# EAGLE board femtoBeacon_r2.0.7_RGB_OTG_PANELIZED (EAGLE 7.6.0), part 1 of 9
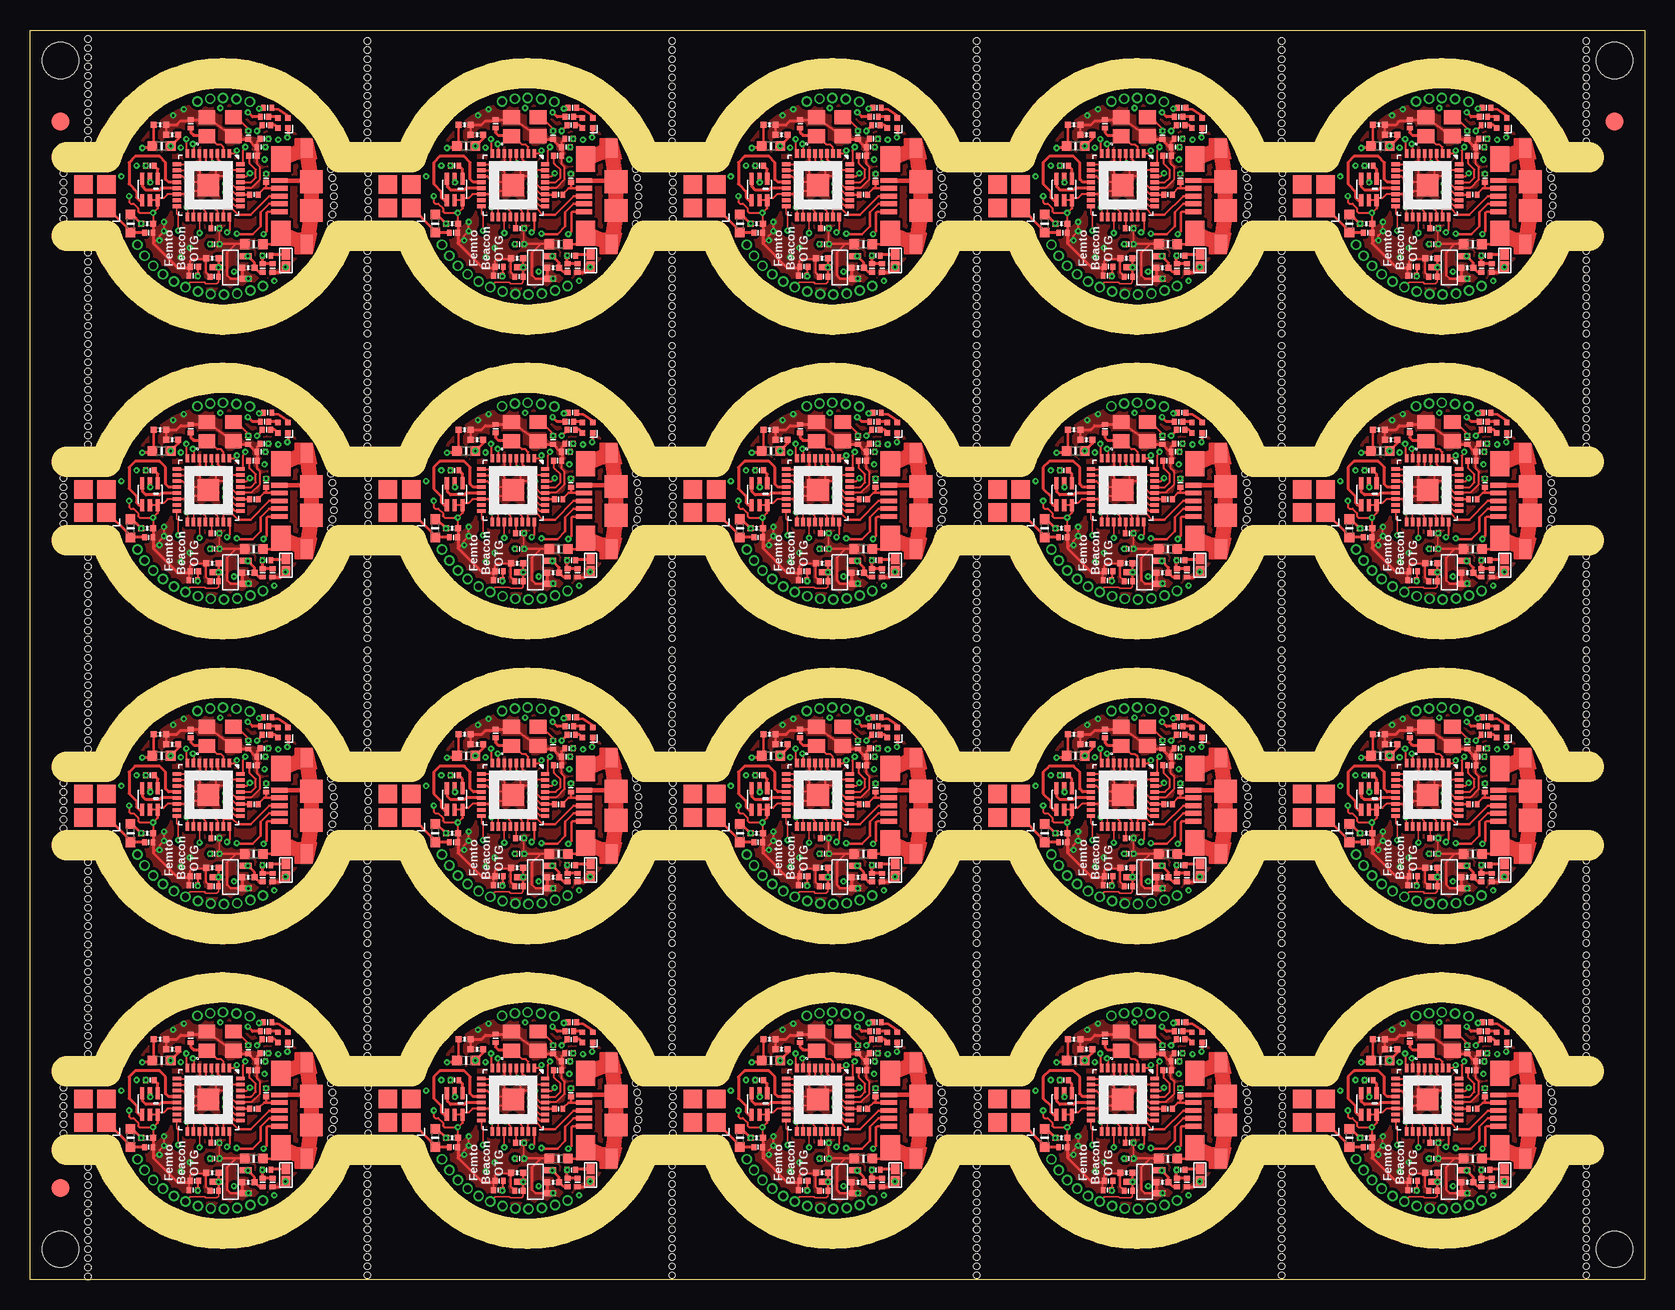
[diagram p0: board, top side]
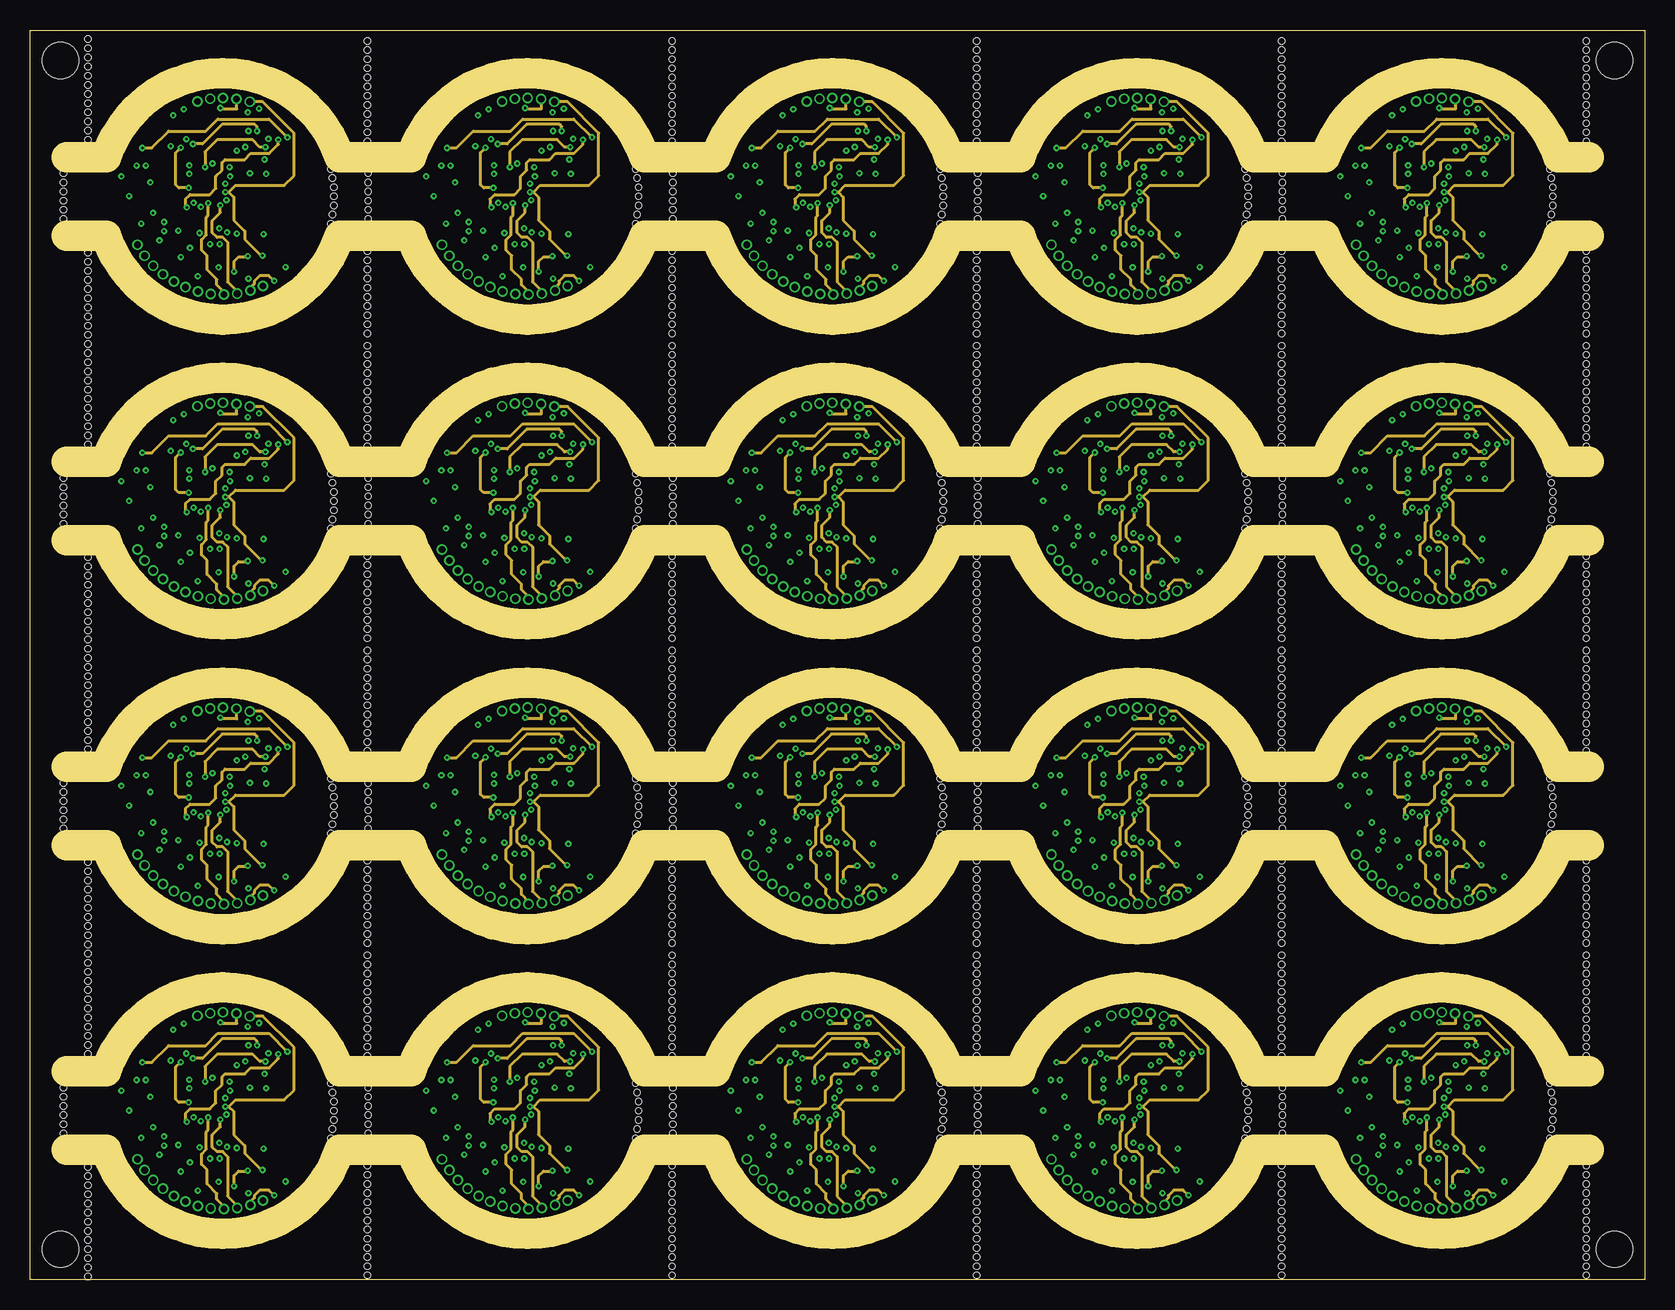
[diagram p1: board, inner layer Route2]
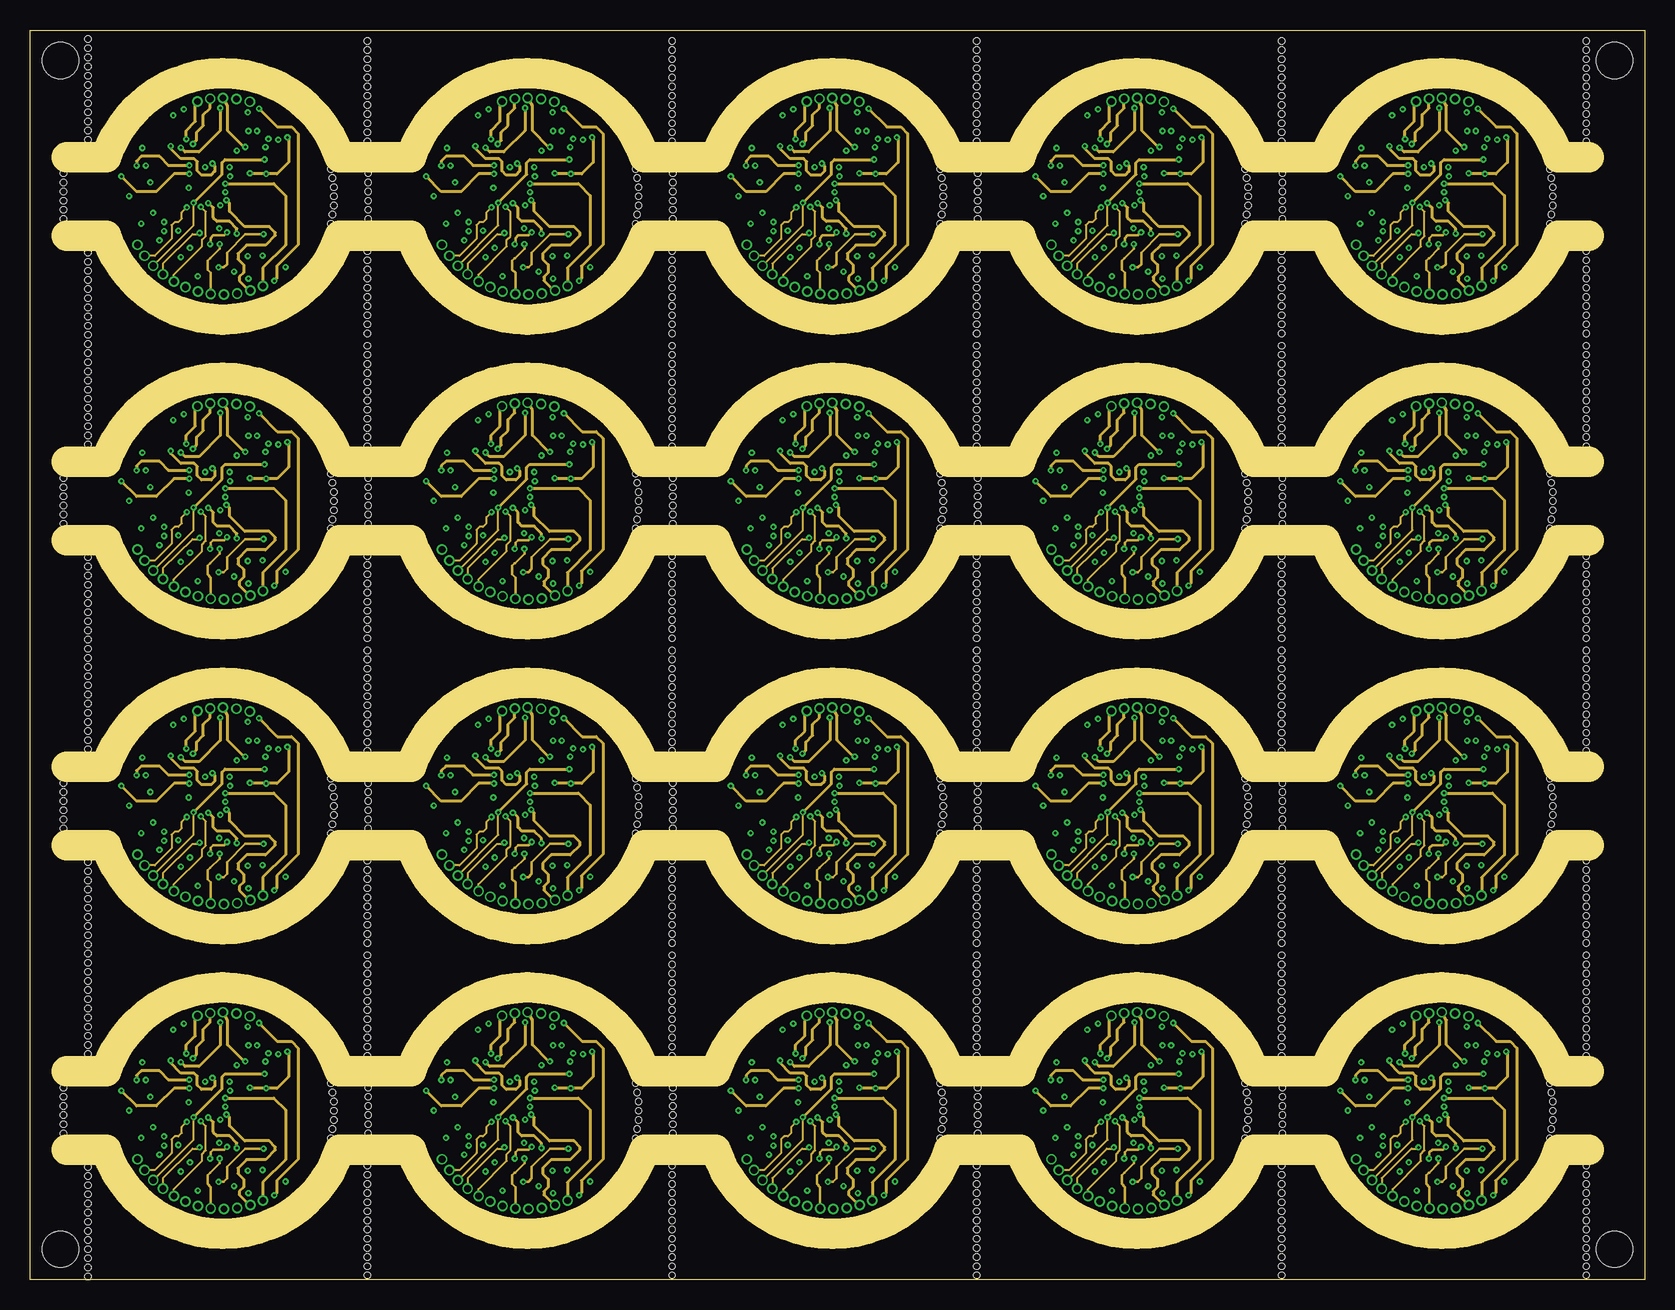
[diagram p2: board, inner layer Route15]
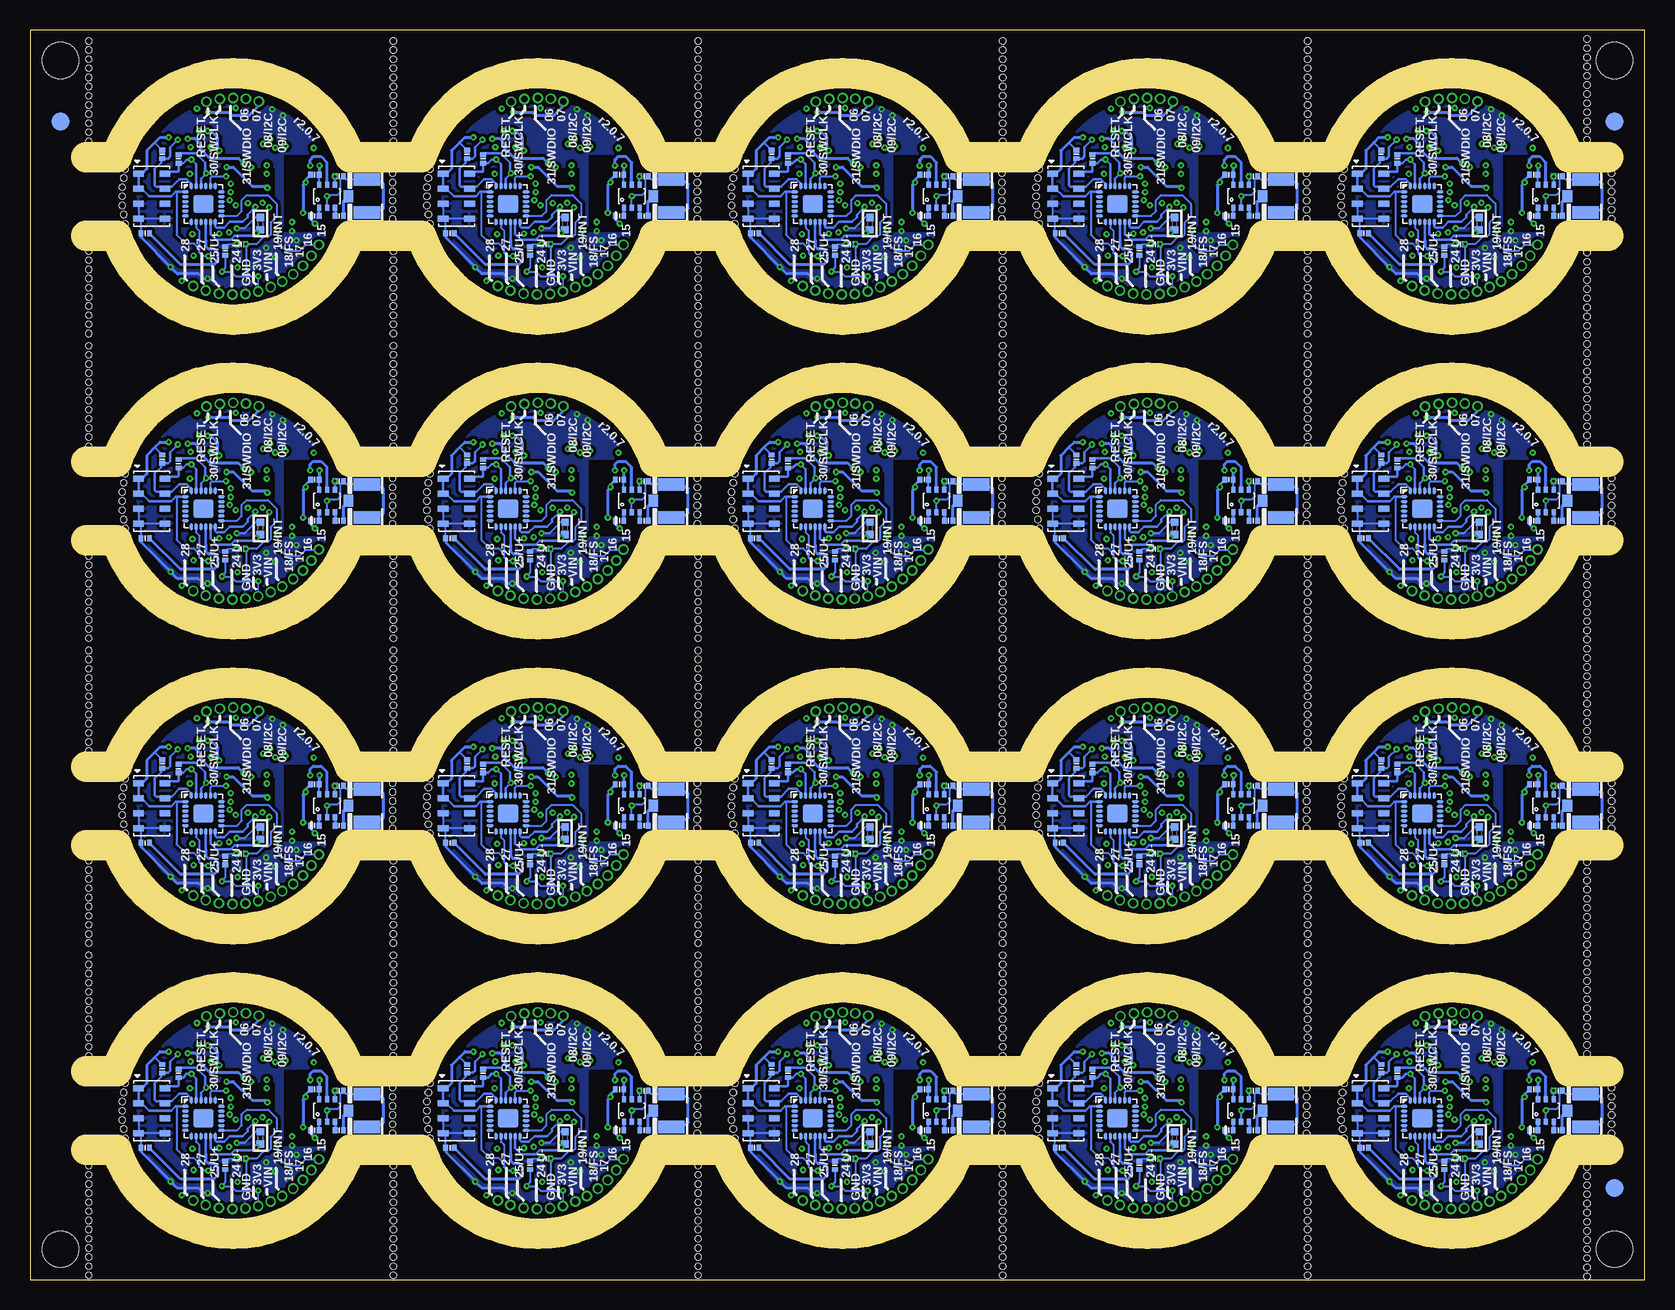
[diagram p3: board, bottom side, seen from below]

Size 134.62 x 104.14 mm. Coordinates in mm from the lower left corner, seen from the top.
Outline: 0,0 0,104.14 134.62,104.14 134.62,0 0,0
Copper layers (1*2*15*16): Top 0.035559375mm / dielectric 0.17018125mm / Route2 0.01778125mm / dielectric 47mil / Route15 0.01778125mm / dielectric 0.17018125mm / Bottom 0.035559375mm
Design rules "OSHPark-4layer *": minimum track width 5mil, minimum drill 10mil, track to track 5mil, track to pad 5mil, pad to pad 5mil, via to via 5mil, smd to smd 5mil, copper to edge 15mil, drill to drill 6mil, minimum pad ring 4mil, minimum via ring 4mil, stop-mask expansion 2.5mil, vias tented up to drill 10mil, thermal gap 10mil
Holes 0.51 mm at 2.79,16 2.79,12.19 2.79,12.95 2.79,13.72 2.79,14.48 2.79,15.24 25.33,14.08 25.08,16.37 25.33,14.84 25.33,13.32 25.21,15.6 25.08,11.79 25.21,12.56 4.83,18.8 4.83,9.4 4.83,19.56 4.83,20.32 4.83,21.08 4.83,21.84 4.83,22.61 4.83,23.37 4.83,24.13 4.83,24.89 4.83,25.65 4.83,26.42 4.83,27.18 4.83,8.64 4.83,7.87 4.83,7.11 4.83,6.35 4.83,5.59 4.83,4.83 4.83,4.06 4.83,3.3 28.13,9.51 28.13,8.75 28.13,7.98 28.13,7.22 28.13,6.46 28.13,5.7 28.13,4.94 28.13,4.17 28.13,3.41 28.13,18.65 28.13,19.41 28.13,20.18 28.13,20.94 28.13,21.7 28.13,22.46 28.13,23.22 28.13,23.99 28.13,24.75 28.13,25.51 28.13,26.27 28.13,27.03 2.79,41.4 2.79,37.59 2.79,38.35 2.79,39.12 2.79,39.88 2.79,40.64 25.33,39.48 25.08,41.77 25.33,40.24 25.33,38.72 25.21,41 25.08,37.19 25.21,37.96 4.83,44.2 4.83,34.8 4.83,44.96 4.83,45.72 4.83,46.48 4.83,47.24 4.83,48.01 4.83,48.77 4.83,49.53 4.83,50.29 4.83,51.05 4.83,51.82 4.83,52.58 4.83,34.04 4.83,33.27 4.83,32.51 4.83,31.75 4.83,30.99 4.83,30.23 4.83,29.46 4.83,28.7 28.13,34.91 28.13,34.15 28.13,33.38 28.13,32.62 28.13,31.86 28.13,31.1 28.13,30.34 28.13,29.57 28.13,28.81 28.13,44.05 28.13,44.81 28.13,45.58 28.13,46.34 28.13,47.1 28.13,47.86 28.13,48.62 28.13,49.39 28.13,50.15 28.13,50.91 28.13,51.67 28.13,52.43 2.79,66.8 2.79,62.99 2.79,63.75 2.79,64.52 2.79,65.28 2.79,66.04 25.33,64.88 25.08,67.17 25.33,65.64 25.33,64.12 25.21,66.4 25.08,62.59 25.21,63.36 4.83,69.6 4.83,60.2 4.83,70.36 4.83,71.12 4.83,71.88 4.83,72.64 4.83,73.41 4.83,74.17 4.83,74.93 4.83,75.69 4.83,76.45 4.83,77.22 4.83,77.98 4.83,59.44 4.83,58.67 4.83,57.91 4.83,57.15 4.83,56.39 4.83,55.63 4.83,54.86 4.83,54.1 28.13,60.31 28.13,59.55 28.13,58.78 28.13,58.02 28.13,57.26 28.13,56.5 28.13,55.74 28.13,54.97 28.13,54.21 28.13,69.45 28.13,70.21 28.13,70.98 28.13,71.74 28.13,72.5 28.13,73.26 28.13,74.02 28.13,74.79 28.13,75.55 28.13,76.31 28.13,77.07 28.13,77.83 2.79,92.2 2.79,88.39 2.79,89.15 2.79,89.92 2.79,90.68 2.79,91.44 25.33,90.28 25.08,92.57 25.33,91.04 25.33,89.52 25.21,91.8 25.08,87.99 25.21,88.76 4.83,95 4.83,85.6 4.83,95.76 4.83,96.52 4.83,97.28 4.83,98.04 4.83,98.81 4.83,99.57 4.83,100.33 4.83,101.09 4.83,101.85 4.83,102.62 4.83,103.38 4.83,84.84 4.83,84.07 4.83,83.31 4.83,82.55 4.83,81.79 4.83,81.03 4.83,80.26 4.83,79.5 28.13,85.71 28.13,84.95 28.13,84.18 28.13,83.42 28.13,82.66 28.13,81.9 28.13,81.14 28.13,80.37 28.13,79.61 28.13,94.85 28.13,95.61 28.13,96.38 28.13,97.14 28.13,97.9 28.13,98.66 28.13,99.42 28.13,100.19 28.13,100.95 28.13,101.71 28.13,102.47 28.13,103.23 28.19,16 28.19,12.19 28.19,12.95 28.19,13.72 28.19,14.48 28.19,15.24 50.73,14.08 50.48,16.37 50.73,14.84 50.73,13.32 50.61,15.6 50.48,11.79 50.61,12.56 28.19,41.4 28.19,37.59 28.19,38.35 28.19,39.12 28.19,39.88 28.19,40.64 50.73,39.48 50.48,41.77 50.73,40.24 50.73,38.72 50.61,41 50.48,37.19 50.61,37.96 28.19,66.8 28.19,62.99 28.19,63.75 28.19,64.52 28.19,65.28 28.19,66.04 50.73,64.88 50.48,67.17 50.73,65.64 50.73,64.12 50.61,66.4 50.48,62.59 50.61,63.36 28.19,92.2 28.19,88.39 28.19,89.15 28.19,89.92 28.19,90.68 28.19,91.44 50.73,90.28 50.48,92.57 50.73,91.04 50.73,89.52 50.61,91.8 50.48,87.99 50.61,88.76 53.59,16 53.59,12.19 53.59,12.95 53.59,13.72 53.59,14.48 53.59,15.24 76.13,14.08 75.88,16.37 76.13,14.84 76.13,13.32 76.01,15.6 75.88,11.79 76.01,12.56 53.59,41.4 53.59,37.59 53.59,38.35 53.59,39.12 53.59,39.88 53.59,40.64 76.13,39.48 75.88,41.77 76.13,40.24 76.13,38.72 76.01,41 75.88,37.19 76.01,37.96 53.59,66.8 53.59,62.99 53.59,63.75 53.59,64.52 53.59,65.28 53.59,66.04 76.13,64.88 75.88,67.17 76.13,65.64 76.13,64.12 76.01,66.4 75.88,62.59 76.01,63.36 53.59,92.2 53.59,88.39 53.59,89.15 53.59,89.92 53.59,90.68 53.59,91.44 76.13,90.28 75.88,92.57 76.13,91.04 76.13,89.52 76.01,91.8 75.88,87.99 76.01,88.76 78.99,16 78.99,12.19 78.99,12.95 78.99,13.72 78.99,14.48 78.99,15.24 101.53,14.08 101.28,16.37 101.53,14.84 101.53,13.32 101.41,15.6 101.28,11.79 101.41,12.56 78.99,41.4 78.99,37.59 78.99,38.35 78.99,39.12 78.99,39.88 78.99,40.64 101.53,39.48 101.28,41.77 101.53,40.24 101.53,38.72 101.41,41 101.28,37.19 101.41,37.96 78.99,66.8 78.99,62.99 78.99,63.75 78.99,64.52 78.99,65.28 78.99,66.04 101.53,64.88 101.28,67.17 101.53,65.64 101.53,64.12 101.41,66.4 101.28,62.59 101.41,63.36 78.99,92.2 78.99,88.39 78.99,89.15 78.99,89.92 78.99,90.68 78.99,91.44 101.53,90.28 101.28,92.57 101.53,91.04 101.53,89.52 101.41,91.8 101.28,87.99 101.41,88.76 104.39,16 104.39,12.19 104.39,12.95 104.39,13.72 104.39,14.48 104.39,15.24 126.93,14.08 126.68,16.37 126.93,14.84 126.93,13.32 126.81,15.6 126.68,11.79 126.81,12.56 104.39,41.4 104.39,37.59 104.39,38.35 104.39,39.12 104.39,39.88 104.39,40.64 126.93,39.48 126.68,41.77 126.93,40.24 126.93,38.72 126.81,41 126.68,37.19 126.81,37.96 104.39,66.8 104.39,62.99 104.39,63.75 104.39,64.52 104.39,65.28 104.39,66.04 126.93,64.88 126.68,67.17 126.93,65.64 126.93,64.12 126.81,66.4 126.68,62.59 126.81,63.36 104.39,92.2 104.39,88.39 104.39,89.15 104.39,89.92 104.39,90.68 104.39,91.44 126.93,90.28 126.68,92.57 126.93,91.04 126.93,89.52 126.81,91.8 126.68,87.99 126.81,88.76 4.83,78.74 28.13,78.85 4.83,53.34 28.13,53.45 4.83,27.94 28.13,28.05 4.83,2.54 4.83,1.78 4.83,1.02 4.83,0.25 28.13,2.65 28.13,1.89 28.13,1.13 28.13,0.36 53.53,9.51 53.53,8.75 53.53,7.98 53.53,7.22 53.53,6.46 53.53,5.7 53.53,4.94 53.53,4.17 53.53,3.41 53.53,18.65 53.53,19.41 53.53,20.18 53.53,20.94 53.53,21.7 53.53,22.46 53.53,23.22 53.53,23.99 53.53,24.75 53.53,25.51 53.53,26.27 53.53,27.03 53.53,34.91 53.53,34.15 53.53,33.38 53.53,32.62 53.53,31.86 53.53,31.1 53.53,30.34 53.53,29.57 53.53,28.81 53.53,44.05 53.53,44.81 53.53,45.58 53.53,46.34 53.53,47.1 53.53,47.86 53.53,48.62 53.53,49.39 53.53,50.15 53.53,50.91 53.53,51.67 53.53,52.43 53.53,60.31 53.53,59.55 53.53,58.78 53.53,58.02 53.53,57.26 53.53,56.5 53.53,55.74 53.53,54.97 53.53,54.21 53.53,69.45 53.53,70.21 53.53,70.98 53.53,71.74 53.53,72.5 53.53,73.26 53.53,74.02 53.53,74.79 53.53,75.55 53.53,76.31 53.53,77.07 53.53,77.83 53.53,85.71 53.53,84.95 53.53,84.18 53.53,83.42 53.53,82.66 53.53,81.9 53.53,81.14 53.53,80.37 53.53,79.61 53.53,94.85 53.53,95.61 53.53,96.38 53.53,97.14 53.53,97.9 53.53,98.66 53.53,99.42 53.53,100.19 53.53,100.95 53.53,101.71 53.53,102.47 53.53,103.23 53.53,78.85 53.53,53.45 53.53,28.05 53.53,2.65 53.53,1.89 53.53,1.13 53.53,0.36 78.93,9.51 78.93,8.75 78.93,7.98 78.93,7.22 78.93,6.46 78.93,5.7 78.93,4.94 78.93,4.17 78.93,3.41 78.93,18.65 78.93,19.41 78.93,20.18 78.93,20.94 78.93,21.7 78.93,22.46 78.93,23.22 78.93,23.99 78.93,24.75 78.93,25.51 78.93,26.27 78.93,27.03 78.93,34.91 78.93,34.15 78.93,33.38 78.93,32.62 78.93,31.86 78.93,31.1 78.93,30.34 78.93,29.57 78.93,28.81 78.93,44.05 78.93,44.81 78.93,45.58 78.93,46.34 78.93,47.1 78.93,47.86 78.93,48.62 78.93,49.39 78.93,50.15 78.93,50.91 78.93,51.67 78.93,52.43 78.93,60.31 78.93,59.55 78.93,58.78 78.93,58.02 78.93,57.26 78.93,56.5 78.93,55.74 78.93,54.97 78.93,54.21 78.93,69.45 78.93,70.21 78.93,70.98 78.93,71.74 78.93,72.5 78.93,73.26 78.93,74.02 78.93,74.79 78.93,75.55 78.93,76.31 78.93,77.07 78.93,77.83 78.93,85.71 78.93,84.95 78.93,84.18 78.93,83.42 78.93,82.66 78.93,81.9 78.93,81.14 78.93,80.37 78.93,79.61 78.93,94.85 78.93,95.61 78.93,96.38 78.93,97.14 78.93,97.9 78.93,98.66 78.93,99.42 78.93,100.19 78.93,100.95 78.93,101.71 78.93,102.47 78.93,103.23 78.93,78.85 78.93,53.45 78.93,28.05 78.93,2.65 78.93,1.89 78.93,1.13 78.93,0.36 104.33,9.51 104.33,8.75 104.33,7.98 104.33,7.22 104.33,6.46 104.33,5.7 104.33,4.94 104.33,4.17 104.33,3.41 104.33,18.65 104.33,19.41 104.33,20.18 104.33,20.94 104.33,21.7 104.33,22.46 104.33,23.22 104.33,23.99 104.33,24.75 104.33,25.51 104.33,26.27 104.33,27.03 104.33,34.91 104.33,34.15 104.33,33.38 104.33,32.62 104.33,31.86 104.33,31.1 104.33,30.34 104.33,29.57 104.33,28.81 104.33,44.05 104.33,44.81 104.33,45.58 104.33,46.34 104.33,47.1 104.33,47.86 104.33,48.62 104.33,49.39 104.33,50.15 104.33,50.91 104.33,51.67 104.33,52.43 104.33,60.31 104.33,59.55 104.33,58.78 104.33,58.02 104.33,57.26 104.33,56.5 104.33,55.74 104.33,54.97 104.33,54.21 104.33,69.45 104.33,70.21 104.33,70.98 104.33,71.74 104.33,72.5 104.33,73.26 104.33,74.02 104.33,74.79 104.33,75.55 104.33,76.31 104.33,77.07 104.33,77.83 104.33,85.71 104.33,84.95 104.33,84.18 104.33,83.42 104.33,82.66 104.33,81.9 104.33,81.14 104.33,80.37 104.33,79.61 104.33,94.85 104.33,95.61 104.33,96.38 104.33,97.14 104.33,97.9 104.33,98.66 104.33,99.42 104.33,100.19 104.33,100.95 104.33,101.71 104.33,102.47 104.33,103.23 104.33,78.85 104.33,53.45 104.33,28.05 104.33,2.65 104.33,1.89 104.33,1.13 104.33,0.36 129.73,9.51 129.73,8.75 129.73,7.98 129.73,7.22 129.73,6.46 129.73,5.7 129.73,4.94 129.73,4.17 129.73,3.41 129.73,18.65 129.73,19.41 129.73,20.18 129.73,20.94 129.73,21.7 129.73,22.46 129.73,23.22 129.73,23.99 129.73,24.75 129.73,25.51 129.73,26.27 129.73,27.03 129.73,34.91 129.73,34.15 129.73,33.38 129.73,32.62 129.73,31.86 129.73,31.1 129.73,30.34 129.73,29.57 129.73,28.81 129.73,44.05 129.73,44.81 129.73,45.58 129.73,46.34 129.73,47.1 129.73,47.86 129.73,48.62 129.73,49.39 129.73,50.15 129.73,50.91 129.73,51.67 129.73,52.43 129.73,60.31 129.73,59.55 129.73,58.78 129.73,58.02 129.73,57.26 129.73,56.5 129.73,55.74 129.73,54.97 129.73,54.21 129.73,69.45 129.73,70.21 129.73,70.98 129.73,71.74 129.73,72.5 129.73,73.26 129.73,74.02 129.73,74.79 129.73,75.55 129.73,76.31 129.73,77.07 129.73,77.83 129.73,85.71 129.73,84.95 129.73,84.18 129.73,83.42 129.73,82.66 129.73,81.9 129.73,81.14 129.73,80.37 129.73,79.61 129.73,94.85 129.73,95.61 129.73,96.38 129.73,97.14 129.73,97.9 129.73,98.66 129.73,99.42 129.73,100.19 129.73,100.95 129.73,101.71 129.73,102.47 129.73,103.23 129.73,78.85 129.73,53.45 129.73,28.05 129.73,2.65 129.73,1.89 129.73,1.13 129.73,0.36
Holes 3 mm at 2.54,2.54 2.54,101.6 132.08,101.6 132.08,2.54
Milling: 160 lines

## Footprints (pad centres in the part's own frame; a part is rotated, then mirrored left to right if it is on the bottom)
0479480001 = smd 1.54 x 1.54: ANT -0.963,0.963; NC1 0.978,0.963; NC2 0.978,-0.978; NC3 -0.963,-0.978
AS222-92LF = smd 0.35 x 0.5: PIN1 -0.65,-0.95; PIN2 0,-0.95; PIN3 0.65,-0.95; PIN4 0.65,0.95; PIN5 0,0.95; PIN6 -0.65,0.95
0805_BALUN = smd 1 x 0.35: 1 -0.9,0.65; 2 -0.9,0; 3 -0.9,-0.65; 4 0.9,-0.65; 5 0.9,0; 6 0.9,0.65
MS5611-01BA03 = smd 0.9 x 0.5: 1 -1.1,1.875; 2 -1.1,0.625; 3 -1.1,-0.625; 4 -1.1,-1.875; 5 1.1,-1.875; 6 1.1,-0.625; 7 1.1,0.625; 8 1.1,1.875
SPST_SMD = smd 0.889 x 0.699: 1 -0.508,0; 2 0.508,0
PART = smd 0.4 x 0.5: 1 -0.35,0; 2 0.35,0
_0402MP = smd 0.5 x 0.5: 1 -0.508,0; 2 0.508,0
_0603MP = smd 0.8 x 0.8: 1 -0.762,0; 2 0.762,0
FIDUCIAL_1MM = smd 1.5 x 1.5: 1 0,0
QFN32 = smd 0.7 x 0.3: 1 -2.65,1.75; 2 -2.65,1.25; 3 -2.65,0.75; 4 -2.65,0.25; 5 -2.65,-0.25; 6 -2.65,-0.75; 7 -2.65,-1.25; 8 -2.65,-1.75; 17 2.65,-1.75; 18 2.65,-1.25; 19 2.65,-0.75; 20 2.65,-0.25; 21 2.65,0.25; 22 2.65,0.75; 23 2.65,1.25; 24 2.65,1.75 | smd 0.3 x 0.7: 9 -1.75,-2.65; 10 -1.25,-2.65; 11 -0.75,-2.65; 12 -0.25,-2.65; 13 0.25,-2.65; 14 0.75,-2.65; 15 1.25,-2.65; 16 1.75,-2.65; 25 1.75,2.65; 26 1.25,2.65; 27 0.75,2.65; 28 0.25,2.65; 29 -0.25,2.65; 30 -0.75,2.65; 31 -1.25,2.65; 32 -1.75,2.65 | smd 1.8 x 1.8: 33 0,0
QFN_3X3MM = smd 0.6 x 0.25: P$1 -1.5,1; P$2 -1.5,0.6; P$3 -1.5,0.2; P$4 -1.5,-0.2; P$5 -1.5,-0.6; P$6 -1.5,-1; P$13 1.5,-1; P$14 1.5,-0.6; P$15 1.5,-0.2; P$16 1.5,0.2; P$17 1.5,0.6; P$18 1.5,1 | smd 0.25 x 0.6: P$7 -1,-1.5; P$8 -0.6,-1.5; P$9 -0.2,-1.5; P$10 0.2,-1.5; P$11 0.6,-1.5; P$12 1,-1.5; P$19 1,1.5; P$20 0.6,1.5; P$21 0.2,1.5; P$22 -0.2,1.5; P$23 -0.6,1.5; P$24 -1,1.5 | smd 1.7 x 1.54: P$25 0,0
MCP1700T-3302E/TT = smd 0.5 x 1: GND -0.95,-1.25; VIN 0,1.25; VOUT 0.95,-1.25
_0402 = smd 0.6 x 0.6: 1 -0.508,0; 2 0.508,0
LRTB_R48G = smd 0.45 x 0.45: 1 0.425,0.425; 2 0.425,-0.425; 3 -0.425,-0.425; 4 -0.425,0.425
1X1_ROUND = drill 0.559 pad 0.864: P$1 0,0
U.FL = smd 2.2 x 1.05: 1 0,1.375; 2 0,-1.375 | smd 0.8 x 1: 3 1.525,0
USB_MICROB_PACKAGE = smd 0.4 x 1.35: 1 -1.3,1.47; 2 -0.64,1.47; 3 0,1.47; 4 0.66,1.47; 5 1.3,1.47 | smd 2.1 x 1.6: 6 -3.1,1.35; 11 3.1,1.35 | smd 1.6 x 1: 7 -4,-0.8; 10 4,-0.8 | smd 1.9 x 1.9: 8 -1.2,-1.2; 9 1.2,-1.2
TSX-3225 = smd 1.4 x 1.15: 1 -1.1,-0.8; 2 1.1,-0.8; 3 1.1,0.8; 4 -1.1,0.8

## Placement (x,y rotation side)
ANT_SMD  0479480001  [0479480001]  5.43,14.08 180 top
ANT_SMD1  0479480001  [0479480001]  5.43,39.48 180 top
ANT_SMD2  0479480001  [0479480001]  5.43,64.88 180 top
ANT_SMD3  0479480001  [0479480001]  5.43,90.28 180 top
ANT_SMD4  0479480001  [0479480001]  30.83,14.08 180 top
ANT_SMD5  0479480001  [0479480001]  30.83,39.48 180 top
ANT_SMD6  0479480001  [0479480001]  30.83,64.88 180 top
ANT_SMD7  0479480001  [0479480001]  30.83,90.28 180 top
ANT_SMD8  0479480001  [0479480001]  56.23,14.08 180 top
ANT_SMD9  0479480001  [0479480001]  56.23,39.48 180 top
ANT_SMD10  0479480001  [0479480001]  56.23,64.88 180 top
ANT_SMD11  0479480001  [0479480001]  56.23,90.28 180 top
ANT_SMD12  0479480001  [0479480001]  81.63,14.08 180 top
ANT_SMD13  0479480001  [0479480001]  81.63,39.48 180 top
ANT_SMD14  0479480001  [0479480001]  81.63,64.88 180 top
ANT_SMD15  0479480001  [0479480001]  81.63,90.28 180 top
ANT_SMD16  0479480001  [0479480001]  107.03,14.08 180 top
ANT_SMD17  0479480001  [0479480001]  107.03,39.48 180 top
ANT_SMD18  0479480001  [0479480001]  107.03,64.88 180 top
ANT_SMD19  0479480001  [0479480001]  107.03,90.28 180 top
ASWITCH  AS222-92LF  [AS222-92LF]  8.26,14.1 0 bottom
ASWITCH1  AS222-92LF  [AS222-92LF]  8.26,39.5 0 bottom
ASWITCH2  AS222-92LF  [AS222-92LF]  8.26,64.9 0 bottom
ASWITCH3  AS222-92LF  [AS222-92LF]  8.26,90.3 0 bottom
ASWITCH4  AS222-92LF  [AS222-92LF]  33.66,14.1 0 bottom
ASWITCH5  AS222-92LF  [AS222-92LF]  33.66,39.5 0 bottom
ASWITCH6  AS222-92LF  [AS222-92LF]  33.66,64.9 0 bottom
ASWITCH7  AS222-92LF  [AS222-92LF]  33.66,90.3 0 bottom
ASWITCH8  AS222-92LF  [AS222-92LF]  59.05,14.1 0 bottom
ASWITCH9  AS222-92LF  [AS222-92LF]  59.05,39.5 0 bottom
ASWITCH10  AS222-92LF  [AS222-92LF]  59.05,64.9 0 bottom
ASWITCH11  AS222-92LF  [AS222-92LF]  59.05,90.3 0 bottom
ASWITCH12  AS222-92LF  [AS222-92LF]  84.45,14.1 0 bottom
ASWITCH13  AS222-92LF  [AS222-92LF]  84.45,39.5 0 bottom
ASWITCH14  AS222-92LF  [AS222-92LF]  84.45,64.9 0 bottom
ASWITCH15  AS222-92LF  [AS222-92LF]  84.45,90.3 0 bottom
ASWITCH16  AS222-92LF  [AS222-92LF]  109.86,14.1 0 bottom
ASWITCH17  AS222-92LF  [AS222-92LF]  109.86,39.5 0 bottom
ASWITCH18  AS222-92LF  [AS222-92LF]  109.86,64.9 0 bottom
ASWITCH19  AS222-92LF  [AS222-92LF]  109.86,90.3 0 bottom
BALUN  JOHANSON_2450BM15A0015E  [0805_BALUN]  10,14.66 270 top
BALUN1  JOHANSON_2450BM15A0015E  [0805_BALUN]  10,40.06 270 top
BALUN2  JOHANSON_2450BM15A0015E  [0805_BALUN]  10,65.46 270 top
BALUN3  JOHANSON_2450BM15A0015E  [0805_BALUN]  10,90.86 270 top
BALUN4  JOHANSON_2450BM15A0015E  [0805_BALUN]  35.4,14.66 270 top
BALUN5  JOHANSON_2450BM15A0015E  [0805_BALUN]  35.4,40.06 270 top
BALUN6  JOHANSON_2450BM15A0015E  [0805_BALUN]  35.4,65.46 270 top
BALUN7  JOHANSON_2450BM15A0015E  [0805_BALUN]  35.4,90.86 270 top
BALUN8  JOHANSON_2450BM15A0015E  [0805_BALUN]  60.8,14.66 270 top
BALUN9  JOHANSON_2450BM15A0015E  [0805_BALUN]  60.8,40.06 270 top
BALUN10  JOHANSON_2450BM15A0015E  [0805_BALUN]  60.8,65.46 270 top
BALUN11  JOHANSON_2450BM15A0015E  [0805_BALUN]  60.8,90.86 270 top
BALUN12  JOHANSON_2450BM15A0015E  [0805_BALUN]  86.2,14.66 270 top
BALUN13  JOHANSON_2450BM15A0015E  [0805_BALUN]  86.2,40.06 270 top
BALUN14  JOHANSON_2450BM15A0015E  [0805_BALUN]  86.2,65.46 270 top
BALUN15  JOHANSON_2450BM15A0015E  [0805_BALUN]  86.2,90.86 270 top
BALUN16  JOHANSON_2450BM15A0015E  [0805_BALUN]  111.6,14.66 270 top
BALUN17  JOHANSON_2450BM15A0015E  [0805_BALUN]  111.6,40.06 270 top
BALUN18  JOHANSON_2450BM15A0015E  [0805_BALUN]  111.6,65.46 270 top
BALUN19  JOHANSON_2450BM15A0015E  [0805_BALUN]  111.6,90.86 270 top
BARO  MS5611-01BA03  [MS5611-01BA03]  22.87,14.09 0 bottom
BARO1  MS5611-01BA03  [MS5611-01BA03]  22.87,39.49 0 bottom
BARO2  MS5611-01BA03  [MS5611-01BA03]  22.87,64.89 0 bottom
BARO3  MS5611-01BA03  [MS5611-01BA03]  22.87,90.29 0 bottom
BARO4  MS5611-01BA03  [MS5611-01BA03]  48.27,14.09 0 bottom
BARO5  MS5611-01BA03  [MS5611-01BA03]  48.27,39.49 0 bottom
BARO6  MS5611-01BA03  [MS5611-01BA03]  48.27,64.89 0 bottom
BARO7  MS5611-01BA03  [MS5611-01BA03]  48.27,90.29 0 bottom
BARO8  MS5611-01BA03  [MS5611-01BA03]  73.67,14.09 0 bottom
BARO9  MS5611-01BA03  [MS5611-01BA03]  73.67,39.49 0 bottom
BARO10  MS5611-01BA03  [MS5611-01BA03]  73.67,64.89 0 bottom
BARO11  MS5611-01BA03  [MS5611-01BA03]  73.67,90.29 0 bottom
BARO12  MS5611-01BA03  [MS5611-01BA03]  99.07,14.09 0 bottom
BARO13  MS5611-01BA03  [MS5611-01BA03]  99.07,39.49 0 bottom
BARO14  MS5611-01BA03  [MS5611-01BA03]  99.07,64.89 0 bottom
BARO15  MS5611-01BA03  [MS5611-01BA03]  99.07,90.29 0 bottom
BARO16  MS5611-01BA03  [MS5611-01BA03]  124.47,14.09 0 bottom
BARO17  MS5611-01BA03  [MS5611-01BA03]  124.47,39.49 0 bottom
BARO18  MS5611-01BA03  [MS5611-01BA03]  124.47,64.89 0 bottom
BARO19  MS5611-01BA03  [MS5611-01BA03]  124.47,90.29 0 bottom
BTN  DNP  [SPST_SMD]  21.33,8.74 270 top
BTN1  DNP  [SPST_SMD]  21.33,34.14 270 top
BTN2  DNP  [SPST_SMD]  21.33,59.54 270 top
BTN3  DNP  [SPST_SMD]  21.33,84.94 270 top
BTN4  DNP  [SPST_SMD]  46.73,8.74 270 top
BTN5  DNP  [SPST_SMD]  46.73,34.14 270 top
BTN6  DNP  [SPST_SMD]  46.73,59.54 270 top
BTN7  DNP  [SPST_SMD]  46.73,84.94 270 top
BTN8  DNP  [SPST_SMD]  72.13,8.74 270 top
BTN9  DNP  [SPST_SMD]  72.13,34.14 270 top
BTN10  DNP  [SPST_SMD]  72.13,59.54 270 top
BTN11  DNP  [SPST_SMD]  72.13,84.94 270 top
BTN12  DNP  [SPST_SMD]  97.53,8.74 270 top
BTN13  DNP  [SPST_SMD]  97.53,34.14 270 top
BTN14  DNP  [SPST_SMD]  97.53,59.54 270 top
BTN15  DNP  [SPST_SMD]  97.53,84.94 270 top
BTN16  DNP  [SPST_SMD]  122.93,8.74 270 top
BTN17  DNP  [SPST_SMD]  122.93,34.14 270 top
BTN18  DNP  [SPST_SMD]  122.93,59.54 270 top
BTN19  DNP  [SPST_SMD]  122.93,84.94 270 top
C1  0.1uF  [PART]  20.24,8.1 270 top
C2  0.1uF  [PART]  15.44,11.4 0 top
C3  0.1uF  [PART]  20.24,33.5 270 top
C4  0.1uF  [PART]  15.44,36.8 0 top
C5  2.2uF  [_0402MP]  18.21,8.13 180 top
C6  2.2uF  [_0402MP]  15.21,8.91 180 top
C7  0.47uF  [PART]  15.36,7.39 180 top
C8  0.1uF  [PART]  19.53,18.87 180 top
C9  0.1uF  [PART]  18.59,17.45 0 top
C10  0.1uF  [PART]  13.71,8.23 180 top
C11  1.2pF  [_0402MP]  9.78,11.81 0 top
C12  22pF  [PART]  10,16.64 180 top
C13  DNP  [PART]  9.91,11.05 0 top
C14  9pF  [PART]  13.4,20.12 270 top
C15  9pF  [PART]  18.21,19.18 270 top
C16  0.1uF  [PART]  15.41,10.1 0 top
C17  0.1uF  [PART]  19.27,18.19 180 top
C18  22pF  [PART]  7.24,15.75 180 bottom
C19  22pF  [PART]  9.27,15.88 180 bottom
C20  22pF  [PART]  7.24,12.45 180 bottom
C21  10uF  [_0402MP]  10.84,20.04 180 top
C22  10uF  [_0402MP]  11.86,19.2 0 top
C23  22pF  [PART]  9.27,12.45 180 bottom
C24  2.2uF  [_0402MP]  18.21,33.53 180 top
C25  2.2uF  [_0402MP]  15.21,34.31 180 top
C26  0.47uF  [PART]  15.36,32.79 180 top
C27  0.1uF  [PART]  16.73,34.93 90 bottom
C28  0.1uF  [PART]  19.53,44.27 180 top
C29  0.1uF  [PART]  16.73,9.53 90 bottom
C30  0.1uF  [PART]  15.41,10.1 0 bottom
C31  10nF  [PART]  13.61,7.47 0 top
C32  0.1uF  [PART]  23.41,11 180 bottom
C33  0.1uF  [PART]  18.59,42.85 0 top
C34  0.1uF  [PART]  15.41,35.5 0 top
C35  0.1uF  [PART]  19.27,43.59 180 top
C36  10uF  [_0402MP]  10.84,45.44 180 top
C37  10uF  [_0402MP]  11.86,44.6 0 top
C38  0.1uF  [PART]  13.71,33.63 180 top
C39  9pF  [PART]  13.4,45.52 270 top
C40  9pF  [PART]  18.21,44.58 270 top
C41  10nF  [PART]  13.61,32.87 0 top
C42  0.1uF  [PART]  15.41,35.5 0 bottom
C43  0.1uF  [PART]  23.41,36.4 180 bottom
C44  DNP  [PART]  9.91,36.45 0 top
C45  1.2pF  [_0402MP]  9.78,37.21 0 top
C46  22pF  [PART]  10,42.04 180 top
C47  22pF  [PART]  7.24,41.15 180 bottom
C48  22pF  [PART]  9.27,41.27 180 bottom
C49  22pF  [PART]  7.24,37.85 180 bottom
C50  22pF  [PART]  9.27,37.85 180 bottom
C51  0.1uF  [PART]  20.24,58.9 270 top
C52  0.1uF  [PART]  15.44,62.2 0 top
C53  2.2uF  [_0402MP]  18.21,58.93 180 top
C54  2.2uF  [_0402MP]  15.21,59.71 180 top
C55  0.47uF  [PART]  15.36,58.19 180 top
C56  0.1uF  [PART]  16.73,60.33 90 bottom
C57  0.1uF  [PART]  19.53,69.67 180 top
C58  0.1uF  [PART]  18.59,68.25 0 top
C59  0.1uF  [PART]  15.41,60.9 0 top
C60  0.1uF  [PART]  19.27,68.99 180 top
C61  10uF  [_0402MP]  10.84,70.84 180 top
C62  10uF  [_0402MP]  11.86,70 0 top
C63  0.1uF  [PART]  13.71,59.03 180 top
C64  9pF  [PART]  13.4,70.92 270 top
C65  9pF  [PART]  18.21,69.98 270 top
C66  10nF  [PART]  13.61,58.27 0 top
C67  0.1uF  [PART]  15.41,60.9 0 bottom
C68  0.1uF  [PART]  23.41,61.8 180 bottom
C69  DNP  [PART]  9.91,61.85 0 top
C70  1.2pF  [_0402MP]  9.78,62.61 0 top
C71  22pF  [PART]  10,67.44 180 top
C72  22pF  [PART]  7.24,66.55 180 bottom
C73  22pF  [PART]  9.27,66.67 180 bottom
C74  22pF  [PART]  7.24,63.25 180 bottom
C75  22pF  [PART]  9.27,63.25 180 bottom
C76  0.1uF  [PART]  20.24,84.3 270 top
C77  0.1uF  [PART]  15.44,87.6 0 top
C78  2.2uF  [_0402MP]  18.21,84.33 180 top
C79  2.2uF  [_0402MP]  15.21,85.11 180 top
C80  0.47uF  [PART]  15.36,83.59 180 top
C81  0.1uF  [PART]  16.73,85.73 90 bottom
C82  0.1uF  [PART]  19.53,95.07 180 top
C83  0.1uF  [PART]  18.59,93.65 0 top
C84  0.1uF  [PART]  15.41,86.3 0 top
C85  0.1uF  [PART]  19.27,94.39 180 top
C86  10uF  [_0402MP]  10.84,96.24 180 top
C87  10uF  [_0402MP]  11.86,95.4 0 top
C88  0.1uF  [PART]  13.71,84.43 180 top
C89  9pF  [PART]  13.4,96.32 270 top
C90  9pF  [PART]  18.21,95.38 270 top
C91  10nF  [PART]  13.61,83.67 0 top
C92  0.1uF  [PART]  15.41,86.3 0 bottom
C93  0.1uF  [PART]  23.41,87.2 180 bottom
C94  DNP  [PART]  9.91,87.25 0 top
C95  1.2pF  [_0402MP]  9.78,88.01 0 top
C96  22pF  [PART]  10,92.84 180 top
C97  22pF  [PART]  7.24,91.95 180 bottom
C98  22pF  [PART]  9.27,92.08 180 bottom
C99  22pF  [PART]  7.24,88.65 180 bottom
C100  22pF  [PART]  9.27,88.65 180 bottom
C101  0.1uF  [PART]  45.64,8.1 270 top
C102  0.1uF  [PART]  40.84,11.4 0 top
C103  2.2uF  [_0402MP]  43.61,8.13 180 top
C104  2.2uF  [_0402MP]  40.61,8.91 180 top
C105  0.47uF  [PART]  40.76,7.39 180 top
C106  0.1uF  [PART]  42.13,9.53 90 bottom
C107  0.1uF  [PART]  44.93,18.87 180 top
C108  0.1uF  [PART]  43.99,17.45 0 top
C109  0.1uF  [PART]  40.81,10.1 0 top
C110  0.1uF  [PART]  44.67,18.19 180 top
C111  10uF  [_0402MP]  36.24,20.04 180 top
C112  10uF  [_0402MP]  37.26,19.2 0 top
C113  0.1uF  [PART]  39.11,8.23 180 top
C114  9pF  [PART]  38.8,20.12 270 top
C115  9pF  [PART]  43.61,19.18 270 top
C116  10nF  [PART]  39.01,7.47 0 top
C117  0.1uF  [PART]  40.81,10.1 0 bottom
C118  0.1uF  [PART]  48.81,11 180 bottom
C119  DNP  [PART]  35.31,11.05 0 top
C120  1.2pF  [_0402MP]  35.18,11.81 0 top
C121  22pF  [PART]  35.4,16.64 180 top
C122  22pF  [PART]  32.64,15.75 180 bottom
C123  22pF  [PART]  34.67,15.88 180 bottom
C124  22pF  [PART]  32.64,12.45 180 bottom
C125  22pF  [PART]  34.67,12.45 180 bottom
C126  0.1uF  [PART]  45.64,33.5 270 top
C127  0.1uF  [PART]  40.84,36.8 0 top
C128  2.2uF  [_0402MP]  43.61,33.53 180 top
C129  2.2uF  [_0402MP]  40.61,34.31 180 top
C130  0.47uF  [PART]  40.76,32.79 180 top
C131  0.1uF  [PART]  42.13,34.93 90 bottom
C132  0.1uF  [PART]  44.93,44.27 180 top
C133  0.1uF  [PART]  43.99,42.85 0 top
C134  0.1uF  [PART]  40.81,35.5 0 top
C135  0.1uF  [PART]  44.67,43.59 180 top
C136  10uF  [_0402MP]  36.24,45.44 180 top
C137  10uF  [_0402MP]  37.26,44.6 0 top
C138  0.1uF  [PART]  39.11,33.63 180 top
C139  9pF  [PART]  38.8,45.52 270 top
C140  9pF  [PART]  43.61,44.58 270 top
C141  10nF  [PART]  39.01,32.87 0 top
C142  0.1uF  [PART]  40.81,35.5 0 bottom
C143  0.1uF  [PART]  48.81,36.4 180 bottom
C144  DNP  [PART]  35.31,36.45 0 top
C145  1.2pF  [_0402MP]  35.18,37.21 0 top
C146  22pF  [PART]  35.4,42.04 180 top
C147  22pF  [PART]  32.64,41.15 180 bottom
C148  22pF  [PART]  34.67,41.27 180 bottom
C149  22pF  [PART]  32.64,37.85 180 bottom
C150  22pF  [PART]  34.67,37.85 180 bottom
C151  0.1uF  [PART]  45.64,58.9 270 top
C152  0.1uF  [PART]  40.84,62.2 0 top
C153  2.2uF  [_0402MP]  43.61,58.93 180 top
C154  2.2uF  [_0402MP]  40.61,59.71 180 top
C155  0.47uF  [PART]  40.76,58.19 180 top
C156  0.1uF  [PART]  42.13,60.33 90 bottom
C157  0.1uF  [PART]  44.93,69.67 180 top
C158  0.1uF  [PART]  43.99,68.25 0 top
C159  0.1uF  [PART]  40.81,60.9 0 top
C160  0.1uF  [PART]  44.67,68.99 180 top
C161  10uF  [_0402MP]  36.24,70.84 180 top
C162  10uF  [_0402MP]  37.26,70 0 top
C163  0.1uF  [PART]  39.11,59.03 180 top
C164  9pF  [PART]  38.8,70.92 270 top
C165  9pF  [PART]  43.61,69.98 270 top
C166  10nF  [PART]  39.01,58.27 0 top
C167  0.1uF  [PART]  40.81,60.9 0 bottom
C168  0.1uF  [PART]  48.81,61.8 180 bottom
C169  DNP  [PART]  35.31,61.85 0 top
C170  1.2pF  [_0402MP]  35.18,62.61 0 top
C171  22pF  [PART]  35.4,67.44 180 top
C172  22pF  [PART]  32.64,66.55 180 bottom
C173  22pF  [PART]  34.67,66.67 180 bottom
C174  22pF  [PART]  32.64,63.25 180 bottom
C175  22pF  [PART]  34.67,63.25 180 bottom
C176  0.1uF  [PART]  45.64,84.3 270 top
C177  0.1uF  [PART]  40.84,87.6 0 top
C178  2.2uF  [_0402MP]  43.61,84.33 180 top
C179  2.2uF  [_0402MP]  40.61,85.11 180 top
C180  0.47uF  [PART]  40.76,83.59 180 top
C181  0.1uF  [PART]  42.13,85.73 90 bottom
C182  0.1uF  [PART]  44.93,95.07 180 top
C183  0.1uF  [PART]  43.99,93.65 0 top
C184  0.1uF  [PART]  40.81,86.3 0 top
C185  0.1uF  [PART]  44.67,94.39 180 top
C186  10uF  [_0402MP]  36.24,96.24 180 top
C187  10uF  [_0402MP]  37.26,95.4 0 top
C188  0.1uF  [PART]  39.11,84.43 180 top
C189  9pF  [PART]  38.8,96.32 270 top
C190  9pF  [PART]  43.61,95.38 270 top
C191  10nF  [PART]  39.01,83.67 0 top
C192  0.1uF  [PART]  40.81,86.3 0 bottom
C193  0.1uF  [PART]  48.81,87.2 180 bottom
C194  DNP  [PART]  35.31,87.25 0 top
C195  1.2pF  [_0402MP]  35.18,88.01 0 top
C196  22pF  [PART]  35.4,92.84 180 top
C197  22pF  [PART]  32.64,91.95 180 bottom
C198  22pF  [PART]  34.67,92.08 180 bottom
C199  22pF  [PART]  32.64,88.65 180 bottom
C200  22pF  [PART]  34.67,88.65 180 bottom
C201  0.1uF  [PART]  71.04,8.1 270 top
C202  0.1uF  [PART]  66.24,11.4 0 top
C203  2.2uF  [_0402MP]  69.01,8.13 180 top
C204  2.2uF  [_0402MP]  66.01,8.91 180 top
C205  0.47uF  [PART]  66.16,7.39 180 top
C206  0.1uF  [PART]  67.53,9.53 90 bottom
C207  0.1uF  [PART]  70.33,18.87 180 top
C208  0.1uF  [PART]  69.39,17.45 0 top
C209  0.1uF  [PART]  66.21,10.1 0 top
C210  0.1uF  [PART]  70.07,18.19 180 top
C211  10uF  [_0402MP]  61.64,20.04 180 top
C212  10uF  [_0402MP]  62.66,19.2 0 top
C213  0.1uF  [PART]  64.51,8.23 180 top
C214  9pF  [PART]  64.2,20.12 270 top
C215  9pF  [PART]  69.01,19.18 270 top
C216  10nF  [PART]  64.41,7.47 0 top
C217  0.1uF  [PART]  66.21,10.1 0 bottom
C218  0.1uF  [PART]  74.21,11 180 bottom
C219  DNP  [PART]  60.71,11.05 0 top
C220  1.2pF  [_0402MP]  60.58,11.81 0 top
C221  22pF  [PART]  60.8,16.64 180 top
C222  22pF  [PART]  58.04,15.75 180 bottom
C223  22pF  [PART]  60.07,15.88 180 bottom
C224  22pF  [PART]  58.04,12.45 180 bottom
C225  22pF  [PART]  60.07,12.45 180 bottom
C226  0.1uF  [PART]  71.04,33.5 270 top
C227  0.1uF  [PART]  66.24,36.8 0 top
C228  2.2uF  [_0402MP]  69.01,33.53 180 top
C229  2.2uF  [_0402MP]  66.01,34.31 180 top
C230  0.47uF  [PART]  66.16,32.79 180 top
C231  0.1uF  [PART]  67.53,34.93 90 bottom
C232  0.1uF  [PART]  70.33,44.27 180 top
C233  0.1uF  [PART]  69.39,42.85 0 top
C234  0.1uF  [PART]  66.21,35.5 0 top
C235  0.1uF  [PART]  70.07,43.59 180 top
C236  10uF  [_0402MP]  61.64,45.44 180 top
C237  10uF  [_0402MP]  62.66,44.6 0 top
C238  0.1uF  [PART]  64.51,33.63 180 top
C239  9pF  [PART]  64.2,45.52 270 top
C240  9pF  [PART]  69.01,44.58 270 top
C241  10nF  [PART]  64.41,32.87 0 top
C242  0.1uF  [PART]  66.21,35.5 0 bottom
C243  0.1uF  [PART]  74.21,36.4 180 bottom
C244  DNP  [PART]  60.71,36.45 0 top
C245  1.2pF  [_0402MP]  60.58,37.21 0 top
C246  22pF  [PART]  60.8,42.04 180 top
C247  22pF  [PART]  58.04,41.15 180 bottom
C248  22pF  [PART]  60.07,41.27 180 bottom
C249  22pF  [PART]  58.04,37.85 180 bottom
C250  22pF  [PART]  60.07,37.85 180 bottom
C251  0.1uF  [PART]  71.04,58.9 270 top
C252  0.1uF  [PART]  66.24,62.2 0 top
C253  2.2uF  [_0402MP]  69.01,58.93 180 top
C254  2.2uF  [_0402MP]  66.01,59.71 180 top
C255  0.47uF  [PART]  66.16,58.19 180 top
C256  0.1uF  [PART]  67.53,60.33 90 bottom
C257  0.1uF  [PART]  70.33,69.67 180 top
C258  0.1uF  [PART]  69.39,68.25 0 top
C259  0.1uF  [PART]  66.21,60.9 0 top
C260  0.1uF  [PART]  70.07,68.99 180 top
C261  10uF  [_0402MP]  61.64,70.84 180 top
C262  10uF  [_0402MP]  62.66,70 0 top
C263  0.1uF  [PART]  64.51,59.03 180 top
C264  9pF  [PART]  64.2,70.92 270 top
C265  9pF  [PART]  69.01,69.98 270 top
C266  10nF  [PART]  64.41,58.27 0 top
C267  0.1uF  [PART]  66.21,60.9 0 bottom
C268  0.1uF  [PART]  74.21,61.8 180 bottom
C269  DNP  [PART]  60.71,61.85 0 top
C270  1.2pF  [_0402MP]  60.58,62.61 0 top
C271  22pF  [PART]  60.8,67.44 180 top
C272  22pF  [PART]  58.04,66.55 180 bottom
C273  22pF  [PART]  60.07,66.67 180 bottom
C274  22pF  [PART]  58.04,63.25 180 bottom
C275  22pF  [PART]  60.07,63.25 180 bottom
C276  0.1uF  [PART]  71.04,84.3 270 top
C277  0.1uF  [PART]  66.24,87.6 0 top
C278  2.2uF  [_0402MP]  69.01,84.33 180 top
C279  2.2uF  [_0402MP]  66.01,85.11 180 top
C280  0.47uF  [PART]  66.16,83.59 180 top
C281  0.1uF  [PART]  67.53,85.73 90 bottom
C282  0.1uF  [PART]  70.33,95.07 180 top
C283  0.1uF  [PART]  69.39,93.65 0 top
C284  0.1uF  [PART]  66.21,86.3 0 top
C285  0.1uF  [PART]  70.07,94.39 180 top
C286  10uF  [_0402MP]  61.64,96.24 180 top
C287  10uF  [_0402MP]  62.66,95.4 0 top
C288  0.1uF  [PART]  64.51,84.43 180 top
C289  9pF  [PART]  64.2,96.32 270 top
C290  9pF  [PART]  69.01,95.38 270 top
C291  10nF  [PART]  64.41,83.67 0 top
C292  0.1uF  [PART]  66.21,86.3 0 bottom
C293  0.1uF  [PART]  74.21,87.2 180 bottom
C294  DNP  [PART]  60.71,87.25 0 top
C295  1.2pF  [_0402MP]  60.58,88.01 0 top
C296  22pF  [PART]  60.8,92.84 180 top
C297  22pF  [PART]  58.04,91.95 180 bottom
C298  22pF  [PART]  60.07,92.08 180 bottom
C299  22pF  [PART]  58.04,88.65 180 bottom
C300  22pF  [PART]  60.07,88.65 180 bottom
C301  0.1uF  [PART]  96.44,8.1 270 top
C302  0.1uF  [PART]  91.64,11.4 0 top
C303  2.2uF  [_0402MP]  94.41,8.13 180 top
C304  2.2uF  [_0402MP]  91.41,8.91 180 top
C305  0.47uF  [PART]  91.56,7.39 180 top
C306  0.1uF  [PART]  92.93,9.53 90 bottom
C307  0.1uF  [PART]  95.73,18.87 180 top
C308  0.1uF  [PART]  94.79,17.45 0 top
C309  0.1uF  [PART]  91.61,10.1 0 top
C310  0.1uF  [PART]  95.47,18.19 180 top
C311  10uF  [_0402MP]  87.04,20.04 180 top
C312  10uF  [_0402MP]  88.06,19.2 0 top
C313  0.1uF  [PART]  89.91,8.23 180 top
C314  9pF  [PART]  89.6,20.12 270 top
C315  9pF  [PART]  94.41,19.18 270 top
C316  10nF  [PART]  89.81,7.47 0 top
C317  0.1uF  [PART]  91.61,10.1 0 bottom
C318  0.1uF  [PART]  99.61,11 180 bottom
C319  DNP  [PART]  86.11,11.05 0 top
C320  1.2pF  [_0402MP]  85.98,11.81 0 top
C321  22pF  [PART]  86.2,16.64 180 top
C322  22pF  [PART]  83.44,15.75 180 bottom
C323  22pF  [PART]  85.47,15.88 180 bottom
C324  22pF  [PART]  83.44,12.45 180 bottom
C325  22pF  [PART]  85.47,12.45 180 bottom
C326  0.1uF  [PART]  96.44,33.5 270 top
C327  0.1uF  [PART]  91.64,36.8 0 top
C328  2.2uF  [_0402MP]  94.41,33.53 180 top
C329  2.2uF  [_0402MP]  91.41,34.31 180 top
C330  0.47uF  [PART]  91.56,32.79 180 top
C331  0.1uF  [PART]  92.93,34.93 90 bottom
C332  0.1uF  [PART]  95.73,44.27 180 top
C333  0.1uF  [PART]  94.79,42.85 0 top
C334  0.1uF  [PART]  91.61,35.5 0 top
C335  0.1uF  [PART]  95.47,43.59 180 top
C336  10uF  [_0402MP]  87.04,45.44 180 top
C337  10uF  [_0402MP]  88.06,44.6 0 top
C338  0.1uF  [PART]  89.91,33.63 180 top
C339  9pF  [PART]  89.6,45.52 270 top
C340  9pF  [PART]  94.41,44.58 270 top
C341  10nF  [PART]  89.81,32.87 0 top
C342  0.1uF  [PART]  91.61,35.5 0 bottom
C343  0.1uF  [PART]  99.61,36.4 180 bottom
C344  DNP  [PART]  86.11,36.45 0 top
C345  1.2pF  [_0402MP]  85.98,37.21 0 top
C346  22pF  [PART]  86.2,42.04 180 top
C347  22pF  [PART]  83.44,41.15 180 bottom
C348  22pF  [PART]  85.47,41.27 180 bottom
C349  22pF  [PART]  83.44,37.85 180 bottom
C350  22pF  [PART]  85.47,37.85 180 bottom
C351  0.1uF  [PART]  96.44,58.9 270 top
C352  0.1uF  [PART]  91.64,62.2 0 top
C353  2.2uF  [_0402MP]  94.41,58.93 180 top
C354  2.2uF  [_0402MP]  91.41,59.71 180 top
C355  0.47uF  [PART]  91.56,58.19 180 top
C356  0.1uF  [PART]  92.93,60.33 90 bottom
C357  0.1uF  [PART]  95.73,69.67 180 top
C358  0.1uF  [PART]  94.79,68.25 0 top
C359  0.1uF  [PART]  91.61,60.9 0 top
C360  0.1uF  [PART]  95.47,68.99 180 top
C361  10uF  [_0402MP]  87.04,70.84 180 top
C362  10uF  [_0402MP]  88.06,70 0 top
C363  0.1uF  [PART]  89.91,59.03 180 top
C364  9pF  [PART]  89.6,70.92 270 top
C365  9pF  [PART]  94.41,69.98 270 top
C366  10nF  [PART]  89.81,58.27 0 top
C367  0.1uF  [PART]  91.61,60.9 0 bottom
C368  0.1uF  [PART]  99.61,61.8 180 bottom
C369  DNP  [PART]  86.11,61.85 0 top
C370  1.2pF  [_0402MP]  85.98,62.61 0 top
C371  22pF  [PART]  86.2,67.44 180 top
C372  22pF  [PART]  83.44,66.55 180 bottom
C373  22pF  [PART]  85.47,66.67 180 bottom
C374  22pF  [PART]  83.44,63.25 180 bottom
C375  22pF  [PART]  85.47,63.25 180 bottom
C376  0.1uF  [PART]  96.44,84.3 270 top
C377  0.1uF  [PART]  91.64,87.6 0 top
C378  2.2uF  [_0402MP]  94.41,84.33 180 top
C379  2.2uF  [_0402MP]  91.41,85.11 180 top
C380  0.47uF  [PART]  91.56,83.59 180 top
C381  0.1uF  [PART]  92.93,85.73 90 bottom
C382  0.1uF  [PART]  95.73,95.07 180 top
C383  0.1uF  [PART]  94.79,93.65 0 top
C384  0.1uF  [PART]  91.61,86.3 0 top
C385  0.1uF  [PART]  95.47,94.39 180 top
C386  10uF  [_0402MP]  87.04,96.24 180 top
C387  10uF  [_0402MP]  88.06,95.4 0 top
C388  0.1uF  [PART]  89.91,84.43 180 top
C389  9pF  [PART]  89.6,96.32 270 top
C390  9pF  [PART]  94.41,95.38 270 top
C391  10nF  [PART]  89.81,83.67 0 top
C392  0.1uF  [PART]  91.61,86.3 0 bottom
C393  0.1uF  [PART]  99.61,87.2 180 bottom
C394  DNP  [PART]  86.11,87.25 0 top
C395  1.2pF  [_0402MP]  85.98,88.01 0 top
C396  22pF  [PART]  86.2,92.84 180 top
C397  22pF  [PART]  83.44,91.95 180 bottom
C398  22pF  [PART]  85.47,92.08 180 bottom
C399  22pF  [PART]  83.44,88.65 180 bottom
C400  22pF  [PART]  85.47,88.65 180 bottom
C401  0.1uF  [PART]  121.84,8.1 270 top
C402  0.1uF  [PART]  117.04,11.4 0 top
C403  2.2uF  [_0402MP]  119.81,8.13 180 top
C404  2.2uF  [_0402MP]  116.81,8.91 180 top
C405  0.47uF  [PART]  116.96,7.39 180 top
C406  0.1uF  [PART]  118.33,9.53 90 bottom
C407  0.1uF  [PART]  121.13,18.87 180 top
C408  0.1uF  [PART]  120.19,17.45 0 top
C409  0.1uF  [PART]  117.01,10.1 0 top
C410  0.1uF  [PART]  120.87,18.19 180 top
C411  10uF  [_0402MP]  112.44,20.04 180 top
C412  10uF  [_0402MP]  113.46,19.2 0 top
C413  0.1uF  [PART]  115.31,8.23 180 top
C414  9pF  [PART]  115,20.12 270 top
C415  9pF  [PART]  119.81,19.18 270 top
C416  10nF  [PART]  115.21,7.47 0 top
C417  0.1uF  [PART]  117.01,10.1 0 bottom
C418  0.1uF  [PART]  125.01,11 180 bottom
C419  DNP  [PART]  111.51,11.05 0 top
C420  1.2pF  [_0402MP]  111.38,11.81 0 top
C421  22pF  [PART]  111.6,16.64 180 top
C422  22pF  [PART]  108.84,15.75 180 bottom
C423  22pF  [PART]  110.87,15.88 180 bottom
C424  22pF  [PART]  108.84,12.45 180 bottom
C425  22pF  [PART]  110.87,12.45 180 bottom
C426  0.1uF  [PART]  121.84,33.5 270 top
C427  0.1uF  [PART]  117.04,36.8 0 top
C428  2.2uF  [_0402MP]  119.81,33.53 180 top
C429  2.2uF  [_0402MP]  116.81,34.31 180 top
C430  0.47uF  [PART]  116.96,32.79 180 top
C431  0.1uF  [PART]  118.33,34.93 90 bottom
C432  0.1uF  [PART]  121.13,44.27 180 top
C433  0.1uF  [PART]  120.19,42.85 0 top
C434  0.1uF  [PART]  117.01,35.5 0 top
C435  0.1uF  [PART]  120.87,43.59 180 top
C436  10uF  [_0402MP]  112.44,45.44 180 top
C437  10uF  [_0402MP]  113.46,44.6 0 top
C438  0.1uF  [PART]  115.31,33.63 180 top
C439  9pF  [PART]  115,45.52 270 top
C440  9pF  [PART]  119.81,44.58 270 top
C441  10nF  [PART]  115.21,32.87 0 top
C442  0.1uF  [PART]  117.01,35.5 0 bottom
C443  0.1uF  [PART]  125.01,36.4 180 bottom
C444  DNP  [PART]  111.51,36.45 0 top
C445  1.2pF  [_0402MP]  111.38,37.21 0 top
C446  22pF  [PART]  111.6,42.04 180 top
C447  22pF  [PART]  108.84,41.15 180 bottom
C448  22pF  [PART]  110.87,41.27 180 bottom
C449  22pF  [PART]  108.84,37.85 180 bottom
C450  22pF  [PART]  110.87,37.85 180 bottom
C451  0.1uF  [PART]  121.84,58.9 270 top
C452  0.1uF  [PART]  117.04,62.2 0 top
C453  2.2uF  [_0402MP]  119.81,58.93 180 top
C454  2.2uF  [_0402MP]  116.81,59.71 180 top
C455  0.47uF  [PART]  116.96,58.19 180 top
C456  0.1uF  [PART]  118.33,60.33 90 bottom
C457  0.1uF  [PART]  121.13,69.67 180 top
C458  0.1uF  [PART]  120.19,68.25 0 top
C459  0.1uF  [PART]  117.01,60.9 0 top
C460  0.1uF  [PART]  120.87,68.99 180 top
C461  10uF  [_0402MP]  112.44,70.84 180 top
C462  10uF  [_0402MP]  113.46,70 0 top
C463  0.1uF  [PART]  115.31,59.03 180 top
C464  9pF  [PART]  115,70.92 270 top
C465  9pF  [PART]  119.81,69.98 270 top
C466  10nF  [PART]  115.21,58.27 0 top
C467  0.1uF  [PART]  117.01,60.9 0 bottom
C468  0.1uF  [PART]  125.01,61.8 180 bottom
C469  DNP  [PART]  111.51,61.85 0 top
C470  1.2pF  [_0402MP]  111.38,62.61 0 top
C471  22pF  [PART]  111.6,67.44 180 top
C472  22pF  [PART]  108.84,66.55 180 bottom
C473  22pF  [PART]  110.87,66.67 180 bottom
C474  22pF  [PART]  108.84,63.25 180 bottom
C475  22pF  [PART]  110.87,63.25 180 bottom
C476  0.1uF  [PART]  121.84,84.3 270 top
C477  0.1uF  [PART]  117.04,87.6 0 top
C478  2.2uF  [_0402MP]  119.81,84.33 180 top
C479  2.2uF  [_0402MP]  116.81,85.11 180 top
C480  0.47uF  [PART]  116.96,83.59 180 top
C481  0.1uF  [PART]  118.33,85.73 90 bottom
C482  0.1uF  [PART]  121.13,95.07 180 top
C483  0.1uF  [PART]  120.19,93.65 0 top
C484  0.1uF  [PART]  117.01,86.3 0 top
C485  0.1uF  [PART]  120.87,94.39 180 top
C486  10uF  [_0402MP]  112.44,96.24 180 top
C487  10uF  [_0402MP]  113.46,95.4 0 top
C488  0.1uF  [PART]  115.31,84.43 180 top
C489  9pF  [PART]  115,96.32 270 top
C490  9pF  [PART]  119.81,95.38 270 top
C491  10nF  [PART]  115.21,83.67 0 top
C492  0.1uF  [PART]  117.01,86.3 0 bottom
C493  0.1uF  [PART]  125.01,87.2 180 bottom
C494  DNP  [PART]  111.51,87.25 0 top
C495  1.2pF  [_0402MP]  111.38,88.01 0 top
C496  22pF  [PART]  111.6,92.84 180 top
C497  22pF  [PART]  108.84,91.95 180 bottom
C498  22pF  [PART]  110.87,92.08 180 bottom
C499  22pF  [PART]  108.84,88.65 180 bottom
C500  22pF  [PART]  110.87,88.65 180 bottom
FB1  Ferrite  [_0603MP]  18.66,10.08 180 top
FB2  Ferrite  [_0603MP]  18.66,35.48 180 top
FB3  Ferrite  [_0603MP]  18.66,60.88 180 top
FB4  Ferrite  [_0603MP]  18.66,86.28 180 top
FB5  Ferrite  [_0603MP]  44.06,10.08 180 top
FB6  Ferrite  [_0603MP]  44.06,35.48 180 top
FB7  Ferrite  [_0603MP]  44.06,60.88 180 top
FB8  Ferrite  [_0603MP]  44.06,86.28 180 top
FB9  Ferrite  [_0603MP]  69.46,10.08 180 top
FB10  Ferrite  [_0603MP]  69.46,35.48 180 top
FB11  Ferrite  [_0603MP]  69.46,60.88 180 top
FB12  Ferrite  [_0603MP]  69.46,86.28 180 top
FB13  Ferrite  [_0603MP]  94.86,10.08 180 top
FB14  Ferrite  [_0603MP]  94.86,35.48 180 top
FB15  Ferrite  [_0603MP]  94.86,60.88 180 top
FB16  Ferrite  [_0603MP]  94.86,86.28 180 top
FB17  Ferrite  [_0603MP]  120.26,10.08 180 top
FB18  Ferrite  [_0603MP]  120.26,35.48 180 top
FB19  Ferrite  [_0603MP]  120.26,60.88 180 top
FB20  Ferrite  [_0603MP]  120.26,86.28 180 top
FID1  FIDUCIAL  [FIDUCIAL_1MM]  2.54,7.62 0 top
FID2  FIDUCIAL  [FIDUCIAL_1MM]  2.54,96.52 0 top
FID3  FIDUCIAL  [FIDUCIAL_1MM]  132.08,96.52 0 top
FID4  FIDUCIAL  [FIDUCIAL_1MM]  2.54,7.62 0 bottom
FID5  FIDUCIAL  [FIDUCIAL_1MM]  2.54,96.52 0 bottom
FID6  FIDUCIAL  [FIDUCIAL_1MM]  132.08,96.52 0 bottom
IC  ATSAMR21E18A-MUT  [QFN32]  14.89,15 270 top
IC1  ATSAMR21E18A-MUT  [QFN32]  14.89,40.4 270 top
IC2  ATSAMR21E18A-MUT  [QFN32]  14.89,65.8 270 top
IC3  ATSAMR21E18A-MUT  [QFN32]  14.89,91.2 270 top
IC4  ATSAMR21E18A-MUT  [QFN32]  40.29,15 270 top
IC5  ATSAMR21E18A-MUT  [QFN32]  40.29,40.4 270 top
IC6  ATSAMR21E18A-MUT  [QFN32]  40.29,65.8 270 top
IC7  ATSAMR21E18A-MUT  [QFN32]  40.29,91.2 270 top
IC8  ATSAMR21E18A-MUT  [QFN32]  65.69,15 270 top
IC9  ATSAMR21E18A-MUT  [QFN32]  65.69,40.4 270 top
IC10  ATSAMR21E18A-MUT  [QFN32]  65.69,65.8 270 top
IC11  ATSAMR21E18A-MUT  [QFN32]  65.69,91.2 270 top
IC12  ATSAMR21E18A-MUT  [QFN32]  91.09,15 270 top
IC13  ATSAMR21E18A-MUT  [QFN32]  91.09,40.4 270 top
IC14  ATSAMR21E18A-MUT  [QFN32]  91.09,65.8 270 top
IC15  ATSAMR21E18A-MUT  [QFN32]  91.09,91.2 270 top
IC16  ATSAMR21E18A-MUT  [QFN32]  116.49,15 270 top
IC17  ATSAMR21E18A-MUT  [QFN32]  116.49,40.4 270 top
IC18  ATSAMR21E18A-MUT  [QFN32]  116.49,65.8 270 top
IC19  ATSAMR21E18A-MUT  [QFN32]  116.49,91.2 270 top
IMU  MPU-9250  [QFN_3X3MM]  18.57,13.45 0 bottom
IMU1  MPU-9250  [QFN_3X3MM]  18.57,38.84 0 bottom
IMU2  MPU-9250  [QFN_3X3MM]  18.57,64.25 0 bottom
IMU3  MPU-9250  [QFN_3X3MM]  18.57,89.64 0 bottom
IMU4  MPU-9250  [QFN_3X3MM]  43.97,13.45 0 bottom
IMU5  MPU-9250  [QFN_3X3MM]  43.97,38.84 0 bottom
IMU6  MPU-9250  [QFN_3X3MM]  43.97,64.25 0 bottom
IMU7  MPU-9250  [QFN_3X3MM]  43.97,89.64 0 bottom
IMU8  MPU-9250  [QFN_3X3MM]  69.37,13.45 0 bottom
IMU9  MPU-9250  [QFN_3X3MM]  69.37,38.84 0 bottom
IMU10  MPU-9250  [QFN_3X3MM]  69.37,64.25 0 bottom
IMU11  MPU-9250  [QFN_3X3MM]  69.37,89.64 0 bottom
IMU12  MPU-9250  [QFN_3X3MM]  94.77,13.45 0 bottom
IMU13  MPU-9250  [QFN_3X3MM]  94.77,38.84 0 bottom
IMU14  MPU-9250  [QFN_3X3MM]  94.77,64.25 0 bottom
IMU15  MPU-9250  [QFN_3X3MM]  94.77,89.64 0 bottom
IMU16  MPU-9250  [QFN_3X3MM]  120.17,13.45 0 bottom
IMU17  MPU-9250  [QFN_3X3MM]  120.17,38.84 0 bottom
IMU18  MPU-9250  [QFN_3X3MM]  120.17,64.25 0 bottom
IMU19  MPU-9250  [QFN_3X3MM]  120.17,89.64 0 bottom
L1  1.8nH  [_0603MP]  8.38,11.81 270 top
L2  10uH  [_0603MP]  10.97,43.66 0 top
L3  1.8nH  [_0603MP]  8.38,37.21 270 top
L4  10uH  [_0603MP]  10.97,69.06 0 top
L5  1.8nH  [_0603MP]  8.38,62.61 270 top
L6  10uH  [_0603MP]  10.97,18.26 0 top
L7  10uH  [_0603MP]  10.97,94.46 0 top
L8  1.8nH  [_0603MP]  8.38,88.01 270 top
L9  10uH  [_0603MP]  36.37,18.26 0 top
L10  1.8nH  [_0603MP]  33.78,11.81 270 top
L11  10uH  [_0603MP]  36.37,43.66 0 top
L12  1.8nH  [_0603MP]  33.78,37.21 270 top
L13  10uH  [_0603MP]  36.37,69.06 0 top
L14  1.8nH  [_0603MP]  33.78,62.61 270 top
L15  10uH  [_0603MP]  36.37,94.46 0 top
L16  1.8nH  [_0603MP]  33.78,88.01 270 top
L17  10uH  [_0603MP]  61.77,18.26 0 top
L18  1.8nH  [_0603MP]  59.18,11.81 270 top
L19  10uH  [_0603MP]  61.77,43.66 0 top
L20  1.8nH  [_0603MP]  59.18,37.21 270 top
L21  10uH  [_0603MP]  61.77,69.06 0 top
L22  1.8nH  [_0603MP]  59.18,62.61 270 top
L23  10uH  [_0603MP]  61.77,94.46 0 top
L24  1.8nH  [_0603MP]  59.18,88.01 270 top
L25  10uH  [_0603MP]  87.17,18.26 0 top
L26  1.8nH  [_0603MP]  84.58,11.81 270 top
L27  10uH  [_0603MP]  87.17,43.66 0 top
L28  1.8nH  [_0603MP]  84.58,37.21 270 top
L29  10uH  [_0603MP]  87.17,69.06 0 top
L30  1.8nH  [_0603MP]  84.58,62.61 270 top
L31  10uH  [_0603MP]  87.17,94.46 0 top
L32  1.8nH  [_0603MP]  84.58,88.01 270 top
L33  10uH  [_0603MP]  112.57,18.26 0 top
L34  1.8nH  [_0603MP]  109.98,11.81 270 top
L35  10uH  [_0603MP]  112.57,43.66 0 top
L36  1.8nH  [_0603MP]  109.98,37.21 270 top
L37  10uH  [_0603MP]  112.57,69.06 0 top
L38  1.8nH  [_0603MP]  109.98,62.61 270 top
L39  10uH  [_0603MP]  112.57,94.46 0 top
L40  1.8nH  [_0603MP]  109.98,88.01 270 top
LDO_VREG  MCP1700T-3302E/TT  [MCP1700T-3302E/TT]  16.72,8.15 90 top
LDO_VREG1  MCP1700T-3302E/TT  [MCP1700T-3302E/TT]  16.72,33.55 90 top
LDO_VREG2  MCP1700T-3302E/TT  [MCP1700T-3302E/TT]  16.72,58.95 90 top
LDO_VREG3  MCP1700T-3302E/TT  [MCP1700T-3302E/TT]  16.72,84.35 90 top
LDO_VREG4  MCP1700T-3302E/TT  [MCP1700T-3302E/TT]  42.12,8.15 90 top
LDO_VREG5  MCP1700T-3302E/TT  [MCP1700T-3302E/TT]  42.12,33.55 90 top
LDO_VREG6  MCP1700T-3302E/TT  [MCP1700T-3302E/TT]  42.12,58.95 90 top
LDO_VREG7  MCP1700T-3302E/TT  [MCP1700T-3302E/TT]  42.12,84.35 90 top
LDO_VREG8  MCP1700T-3302E/TT  [MCP1700T-3302E/TT]  67.52,8.15 90 top
LDO_VREG9  MCP1700T-3302E/TT  [MCP1700T-3302E/TT]  67.52,33.55 90 top
LDO_VREG10  MCP1700T-3302E/TT  [MCP1700T-3302E/TT]  67.52,58.95 90 top
LDO_VREG11  MCP1700T-3302E/TT  [MCP1700T-3302E/TT]  67.52,84.35 90 top
LDO_VREG12  MCP1700T-3302E/TT  [MCP1700T-3302E/TT]  92.92,8.15 90 top
LDO_VREG13  MCP1700T-3302E/TT  [MCP1700T-3302E/TT]  92.92,33.55 90 top
LDO_VREG14  MCP1700T-3302E/TT  [MCP1700T-3302E/TT]  92.92,58.95 90 top
LDO_VREG15  MCP1700T-3302E/TT  [MCP1700T-3302E/TT]  92.92,84.35 90 top
LDO_VREG16  MCP1700T-3302E/TT  [MCP1700T-3302E/TT]  118.32,8.15 90 top
LDO_VREG17  MCP1700T-3302E/TT  [MCP1700T-3302E/TT]  118.32,33.55 90 top
LDO_VREG18  MCP1700T-3302E/TT  [MCP1700T-3302E/TT]  118.32,58.95 90 top
LDO_VREG19  MCP1700T-3302E/TT  [MCP1700T-3302E/TT]  118.32,84.35 90 top
R1  330  [PART]  19.73,9.14 180 top
R2  10K  [PART]  19.4,8.1 270 top
R3  330  [_0402]  13.81,11.81 270 bottom
R4  330  [PART]  19.71,20.02 0 top
R5  330  [PART]  18.67,14.22 0 top
R6  330  [PART]  19.56,20.7 0 top
R7  330  [PART]  19.81,21.46 0 top
R8  2.2K  [PART]  21.99,17.58 90 bottom
R9  2.2K  [PART]  20.64,17.2 90 bottom
R10  100K  [PART]  19.68,15.6 90 top
R11  330  [PART]  19.73,34.54 180 top
R12  10K  [PART]  19.4,33.5 270 top
R13  2.2K  [PART]  21.99,42.98 90 bottom
R14  2.2K  [PART]  20.64,42.6 90 bottom
R15  330  [_0402]  13.81,37.21 270 bottom
R16  330  [PART]  19.71,45.42 0 top
R17  330  [PART]  19.56,46.1 0 top
R18  330  [PART]  19.81,46.86 0 top
R19  330  [PART]  18.67,39.62 0 top
R20  100K  [PART]  19.68,41 90 top
R21  330  [PART]  19.73,59.94 180 top
R22  10K  [PART]  19.4,58.9 270 top
R23  2.2K  [PART]  21.99,68.38 90 bottom
R24  2.2K  [PART]  20.64,68 90 bottom
R25  330  [_0402]  13.81,62.61 270 bottom
R26  330  [PART]  19.71,70.82 0 top
R27  330  [PART]  19.56,71.5 0 top
R28  330  [PART]  19.81,72.26 0 top
R29  330  [PART]  18.67,65.02 0 top
R30  100K  [PART]  19.68,66.4 90 top
R31  330  [PART]  19.73,85.34 180 top
R32  10K  [PART]  19.4,84.3 270 top
R33  2.2K  [PART]  21.99,93.78 90 bottom
R34  2.2K  [PART]  20.64,93.4 90 bottom
R35  330  [_0402]  13.81,88.01 270 bottom
R36  330  [PART]  19.71,96.22 0 top
R37  330  [PART]  19.56,96.9 0 top
R38  330  [PART]  19.81,97.66 0 top
R39  330  [PART]  18.67,90.42 0 top
R40  100K  [PART]  19.68,91.8 90 top
R41  330  [PART]  45.13,9.14 180 top
R42  10K  [PART]  44.8,8.1 270 top
R43  2.2K  [PART]  47.39,17.58 90 bottom
R44  2.2K  [PART]  46.04,17.2 90 bottom
R45  330  [_0402]  39.21,11.81 270 bottom
R46  330  [PART]  45.11,20.02 0 top
R47  330  [PART]  44.96,20.7 0 top
R48  330  [PART]  45.21,21.46 0 top
R49  330  [PART]  44.07,14.22 0 top
R50  100K  [PART]  45.09,15.6 90 top
R51  330  [PART]  45.13,34.54 180 top
R52  10K  [PART]  44.8,33.5 270 top
R53  2.2K  [PART]  47.39,42.98 90 bottom
R54  2.2K  [PART]  46.04,42.6 90 bottom
R55  330  [_0402]  39.21,37.21 270 bottom
R56  330  [PART]  45.11,45.42 0 top
R57  330  [PART]  44.96,46.1 0 top
R58  330  [PART]  45.21,46.86 0 top
R59  330  [PART]  44.07,39.62 0 top
R60  100K  [PART]  45.09,41 90 top
R61  330  [PART]  45.13,59.94 180 top
R62  10K  [PART]  44.8,58.9 270 top
R63  2.2K  [PART]  47.39,68.38 90 bottom
R64  2.2K  [PART]  46.04,68 90 bottom
R65  330  [_0402]  39.21,62.61 270 bottom
R66  330  [PART]  45.11,70.82 0 top
R67  330  [PART]  44.96,71.5 0 top
R68  330  [PART]  45.21,72.26 0 top
R69  330  [PART]  44.07,65.02 0 top
R70  100K  [PART]  45.09,66.4 90 top
R71  330  [PART]  45.13,85.34 180 top
R72  10K  [PART]  44.8,84.3 270 top
R73  2.2K  [PART]  47.39,93.78 90 bottom
R74  2.2K  [PART]  46.04,93.4 90 bottom
R75  330  [_0402]  39.21,88.01 270 bottom
R76  330  [PART]  45.11,96.22 0 top
R77  330  [PART]  44.96,96.9 0 top
R78  330  [PART]  45.21,97.66 0 top
R79  330  [PART]  44.07,90.42 0 top
R80  100K  [PART]  45.09,91.8 90 top
R81  330  [PART]  70.53,9.14 180 top
R82  10K  [PART]  70.2,8.1 270 top
R83  2.2K  [PART]  72.79,17.58 90 bottom
R84  2.2K  [PART]  71.44,17.2 90 bottom
R85  330  [_0402]  64.61,11.81 270 bottom
R86  330  [PART]  70.51,20.02 0 top
R87  330  [PART]  70.36,20.7 0 top
R88  330  [PART]  70.61,21.46 0 top
R89  330  [PART]  69.47,14.22 0 top
R90  100K  [PART]  70.48,15.6 90 top
R91  330  [PART]  70.53,34.54 180 top
R92  10K  [PART]  70.2,33.5 270 top
R93  2.2K  [PART]  72.79,42.98 90 bottom
R94  2.2K  [PART]  71.44,42.6 90 bottom
R95  330  [_0402]  64.61,37.21 270 bottom
R96  330  [PART]  70.51,45.42 0 top
R97  330  [PART]  70.36,46.1 0 top
R98  330  [PART]  70.61,46.86 0 top
R99  330  [PART]  69.47,39.62 0 top
R100  100K  [PART]  70.48,41 90 top
R101  330  [PART]  70.53,59.94 180 top
R102  10K  [PART]  70.2,58.9 270 top
R103  2.2K  [PART]  72.79,68.38 90 bottom
R104  2.2K  [PART]  71.44,68 90 bottom
R105  330  [_0402]  64.61,62.61 270 bottom
R106  330  [PART]  70.51,70.82 0 top
R107  330  [PART]  70.36,71.5 0 top
R108  330  [PART]  70.61,72.26 0 top
R109  330  [PART]  69.47,65.02 0 top
R110  100K  [PART]  70.48,66.4 90 top
R111  330  [PART]  70.53,85.34 180 top
R112  10K  [PART]  70.2,84.3 270 top
R113  2.2K  [PART]  72.79,93.78 90 bottom
R114  2.2K  [PART]  71.44,93.4 90 bottom
R115  330  [_0402]  64.61,88.01 270 bottom
R116  330  [PART]  70.51,96.22 0 top